# Altium PCB MCU098_MSPM0G3507_PCB.PcbDoc (part 1 of 5)
Units mil, origin at the board's own origin, x right, y up, seen from the top; angles counter-clockwise.
Board outline 2310.03 x 4205.03 mil, 4 copper layers (Top Layer, VCC Layer, GND Layer, Bottom Layer), stack 62.4 mil thick; 260 components, 182 nets, 835 pads, 237 vias.
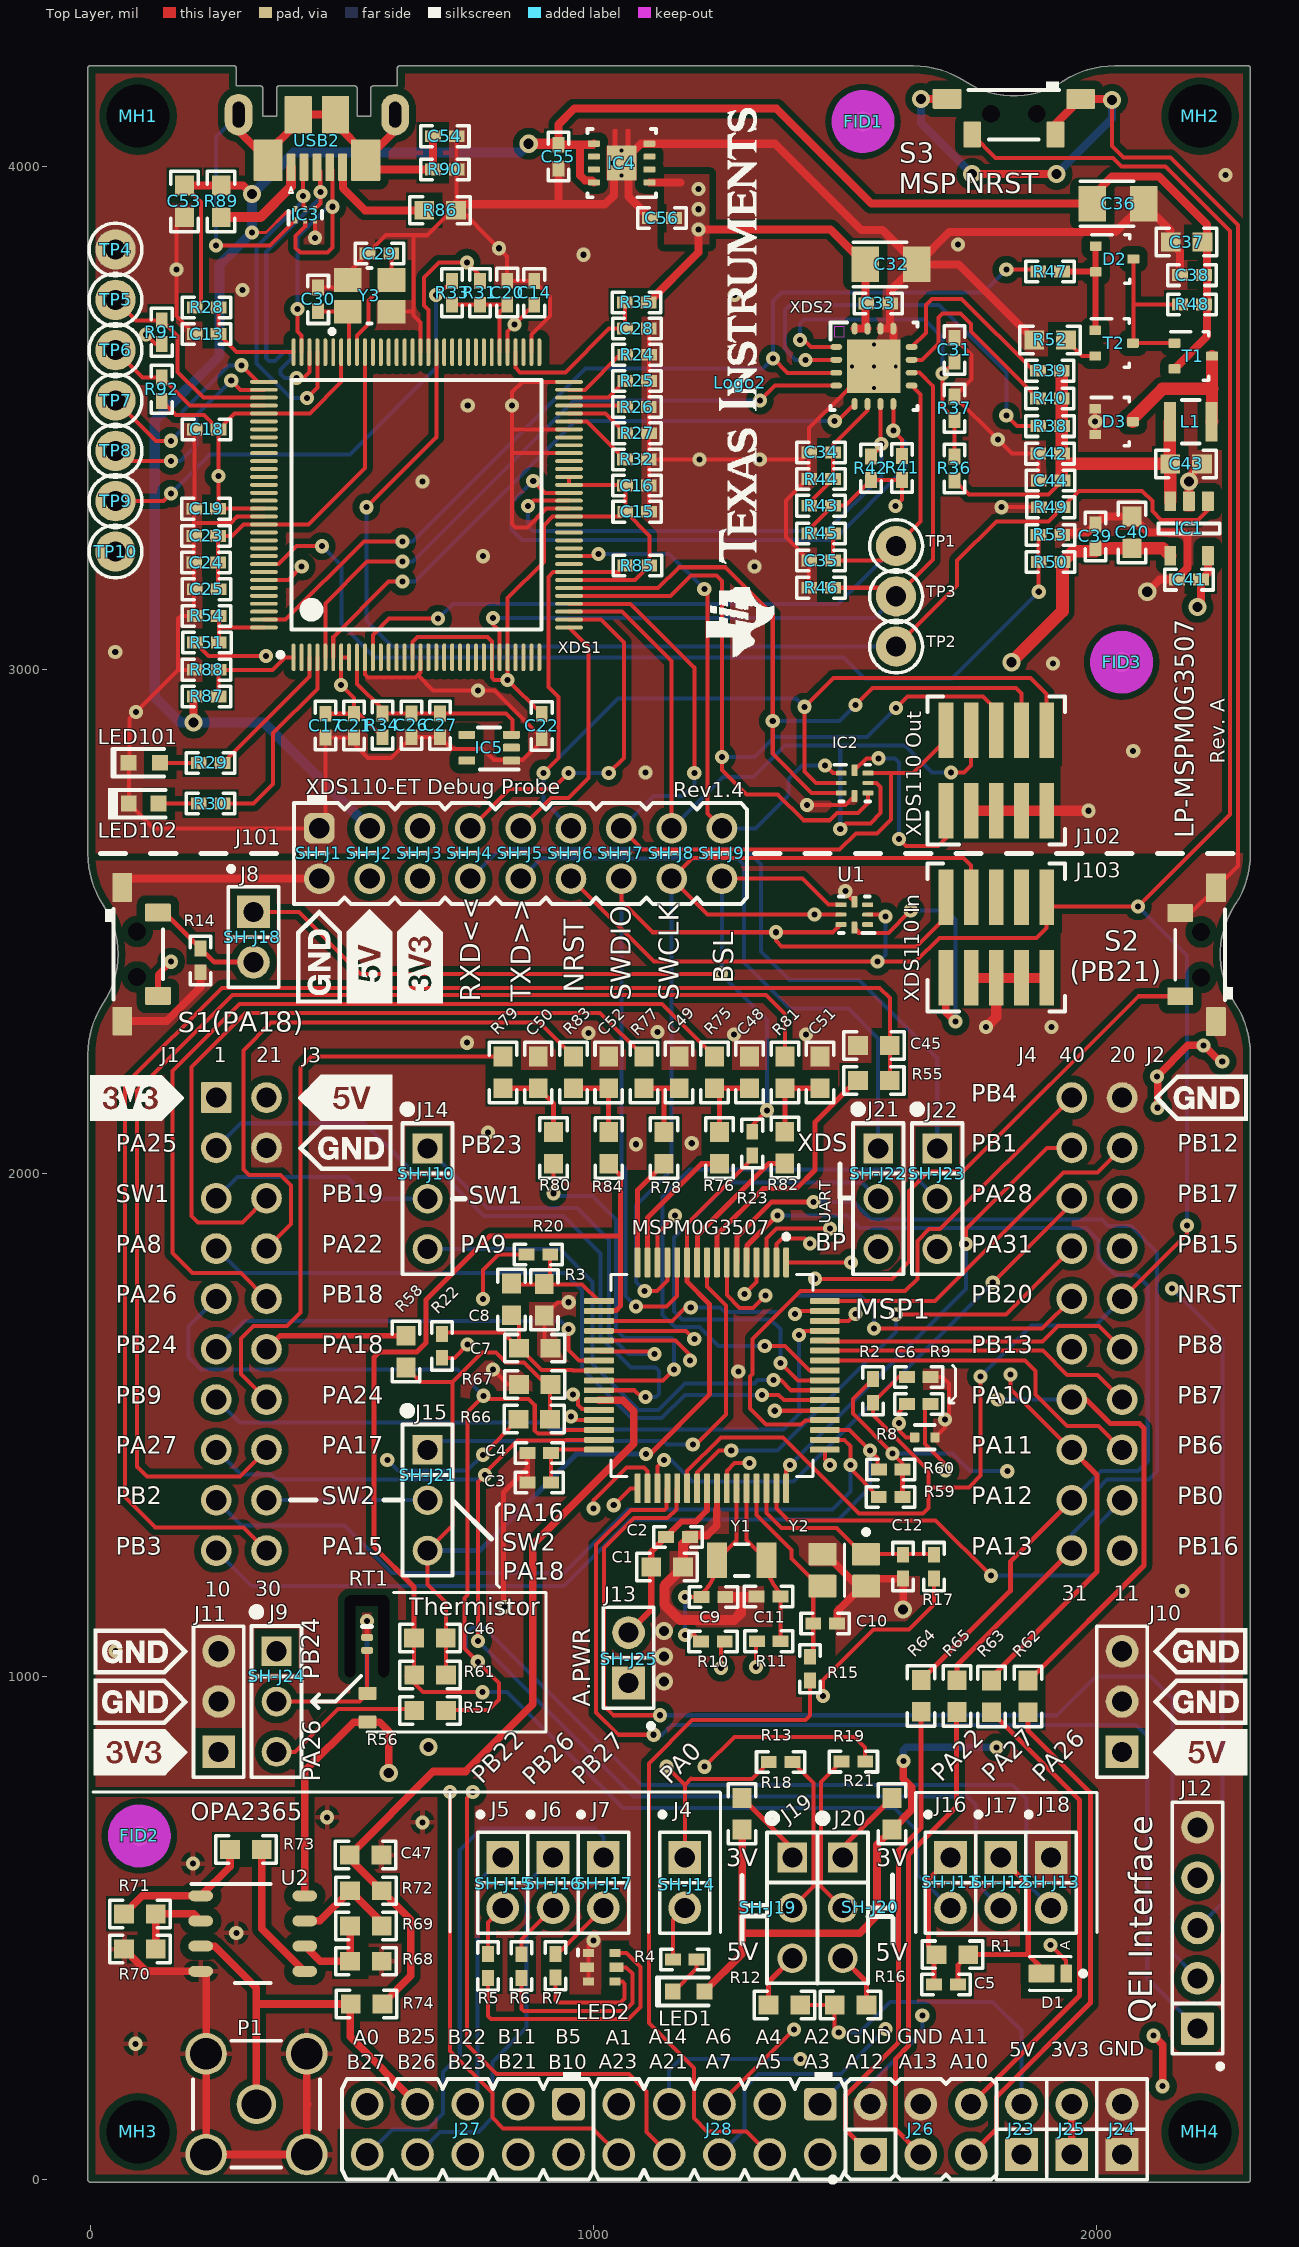
[diagram p0: Top Layer view]
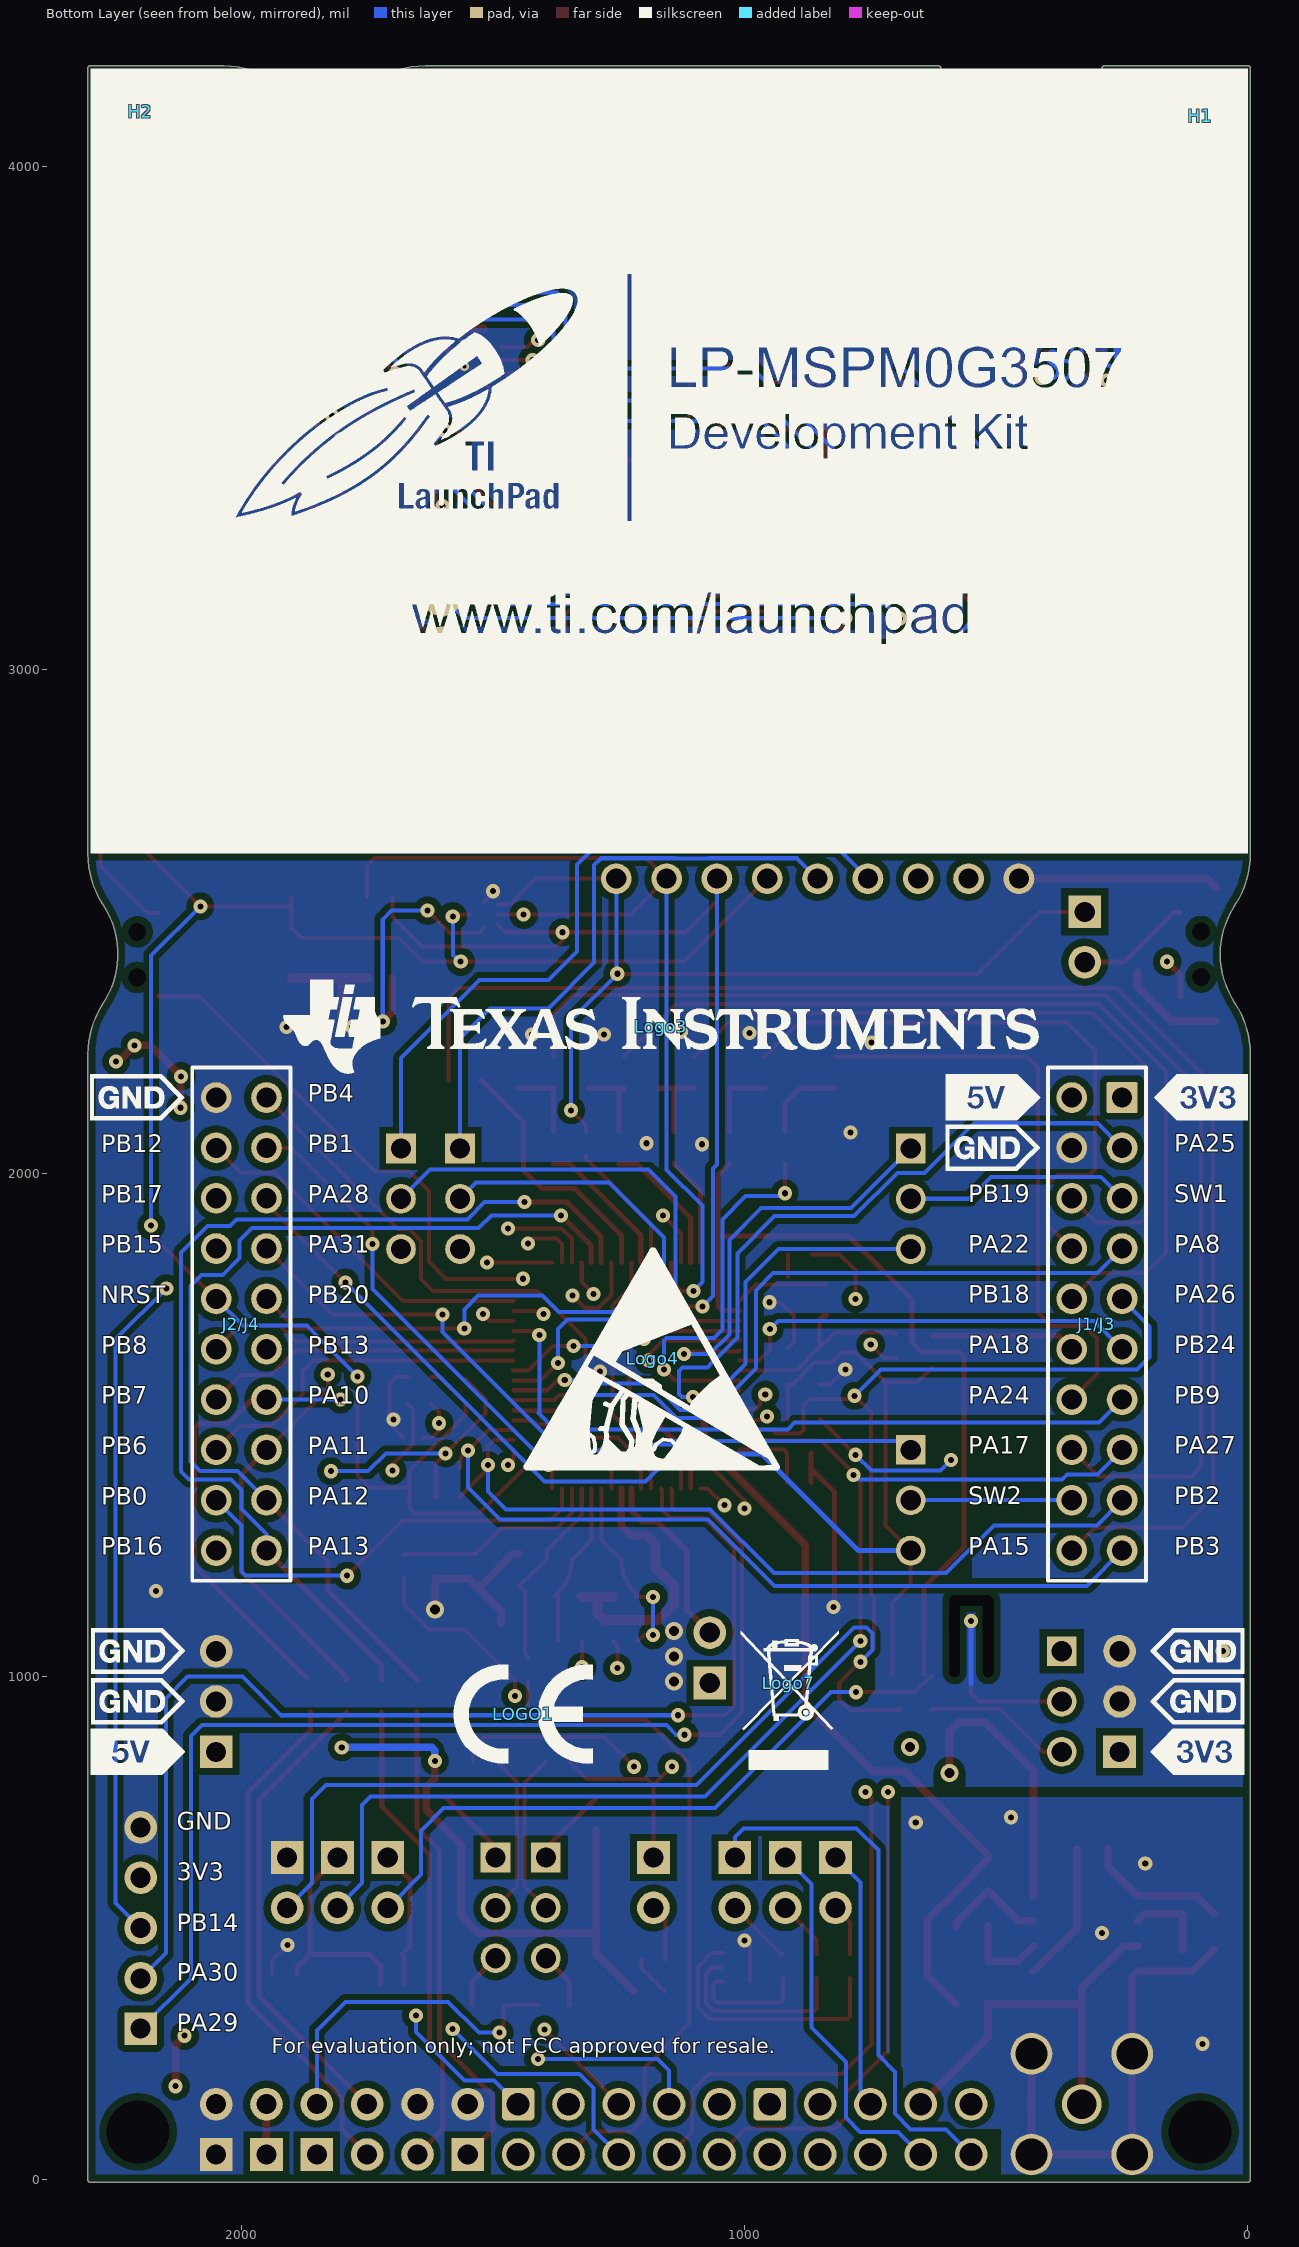
[diagram p1: Bottom Layer view, seen from below]
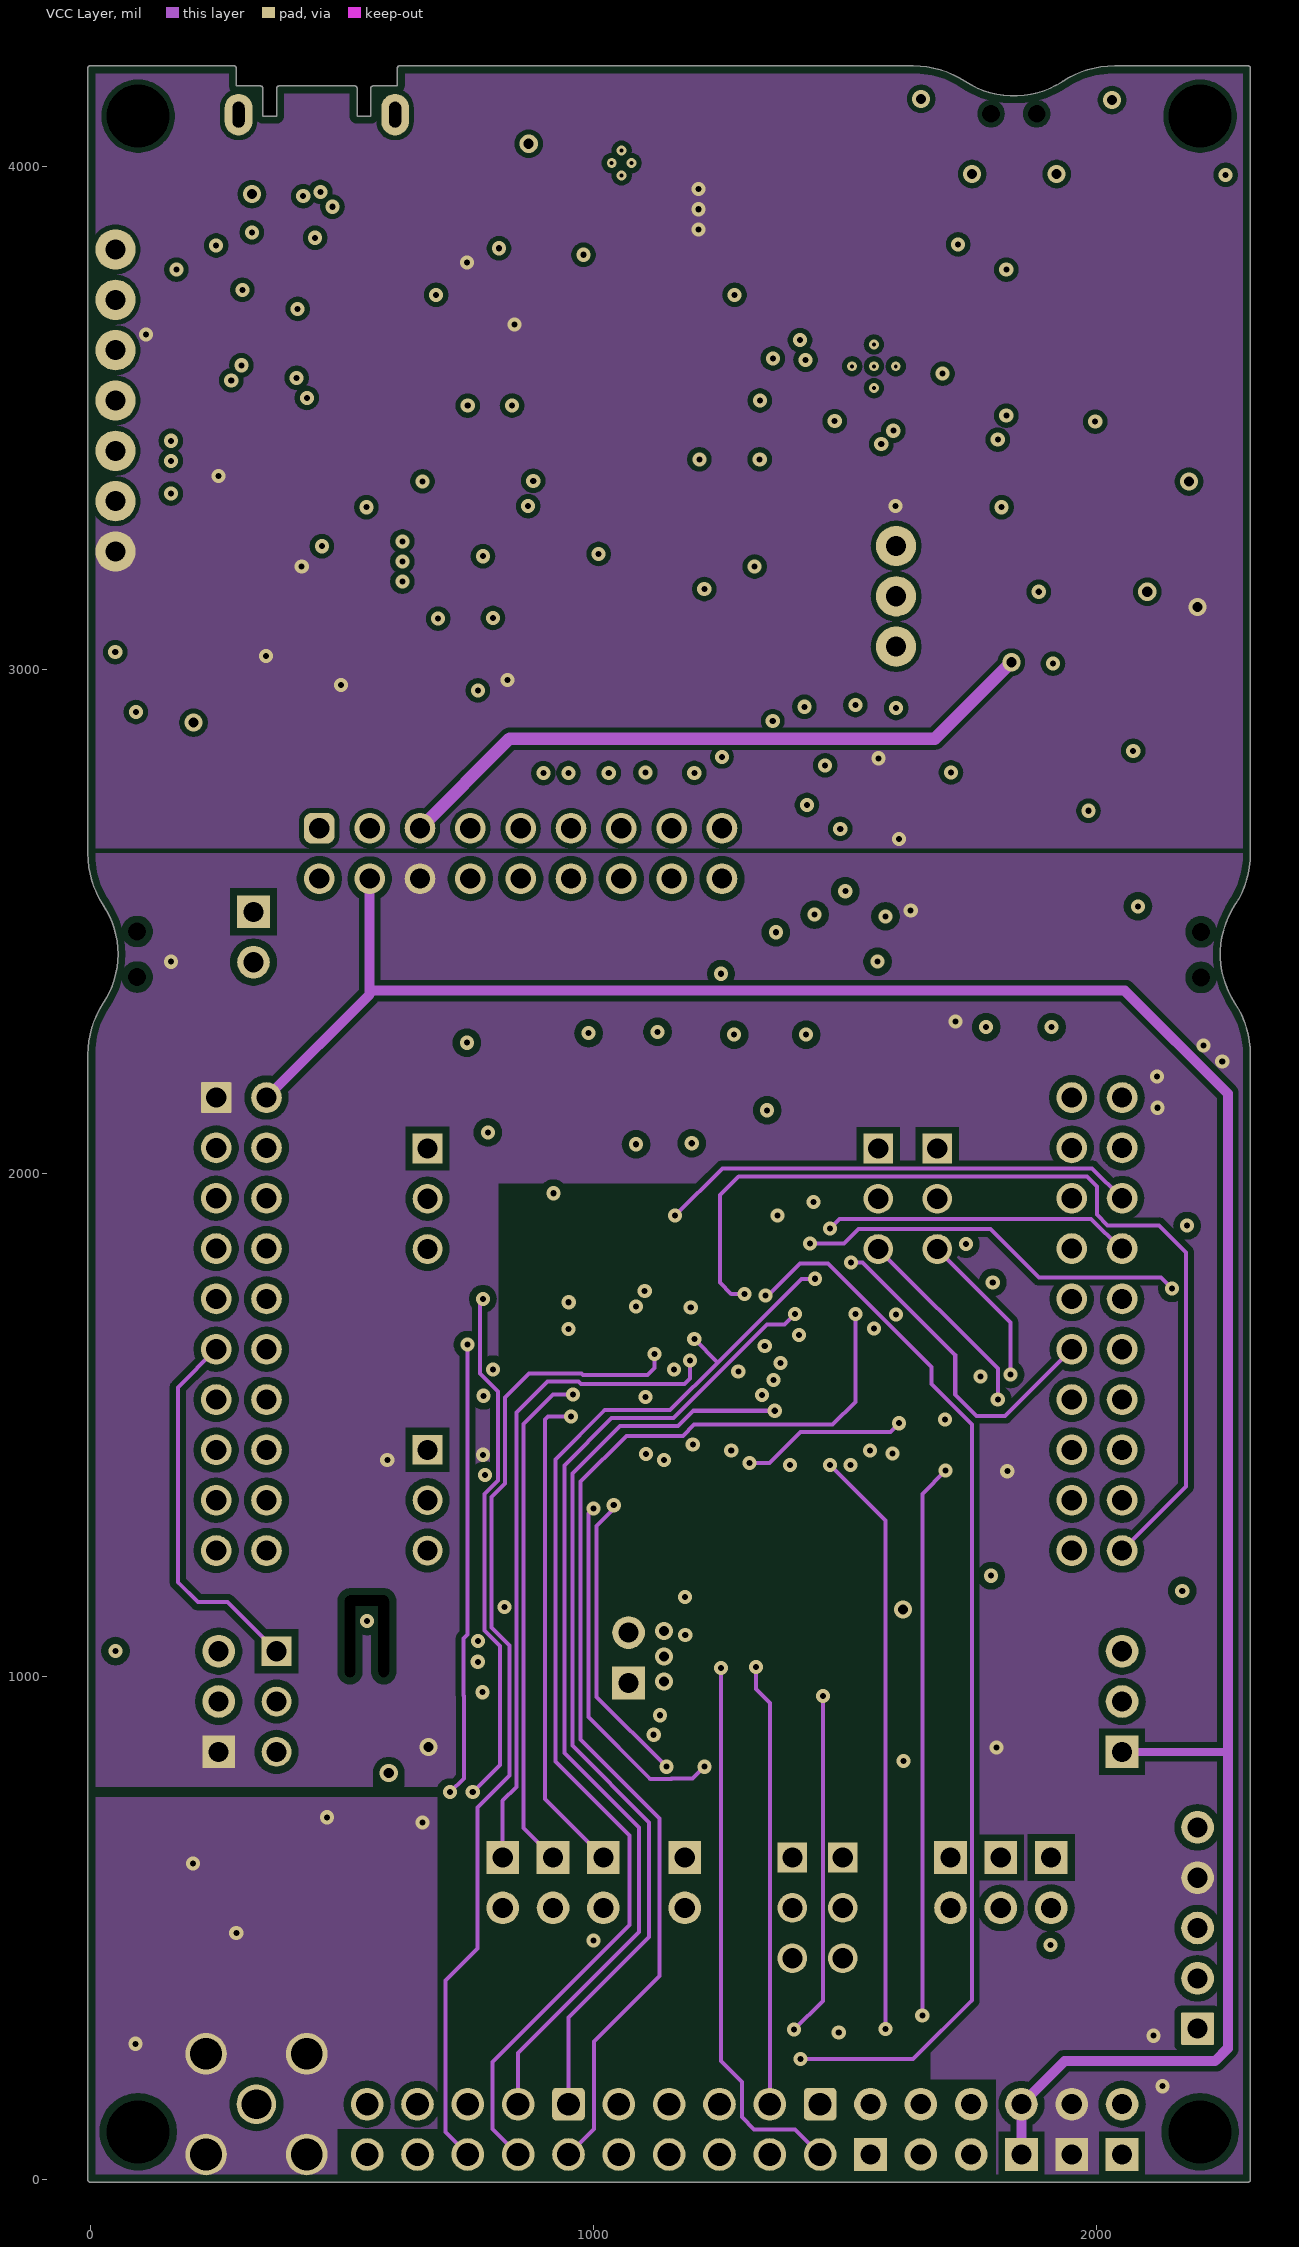
[diagram p2: VCC Layer]
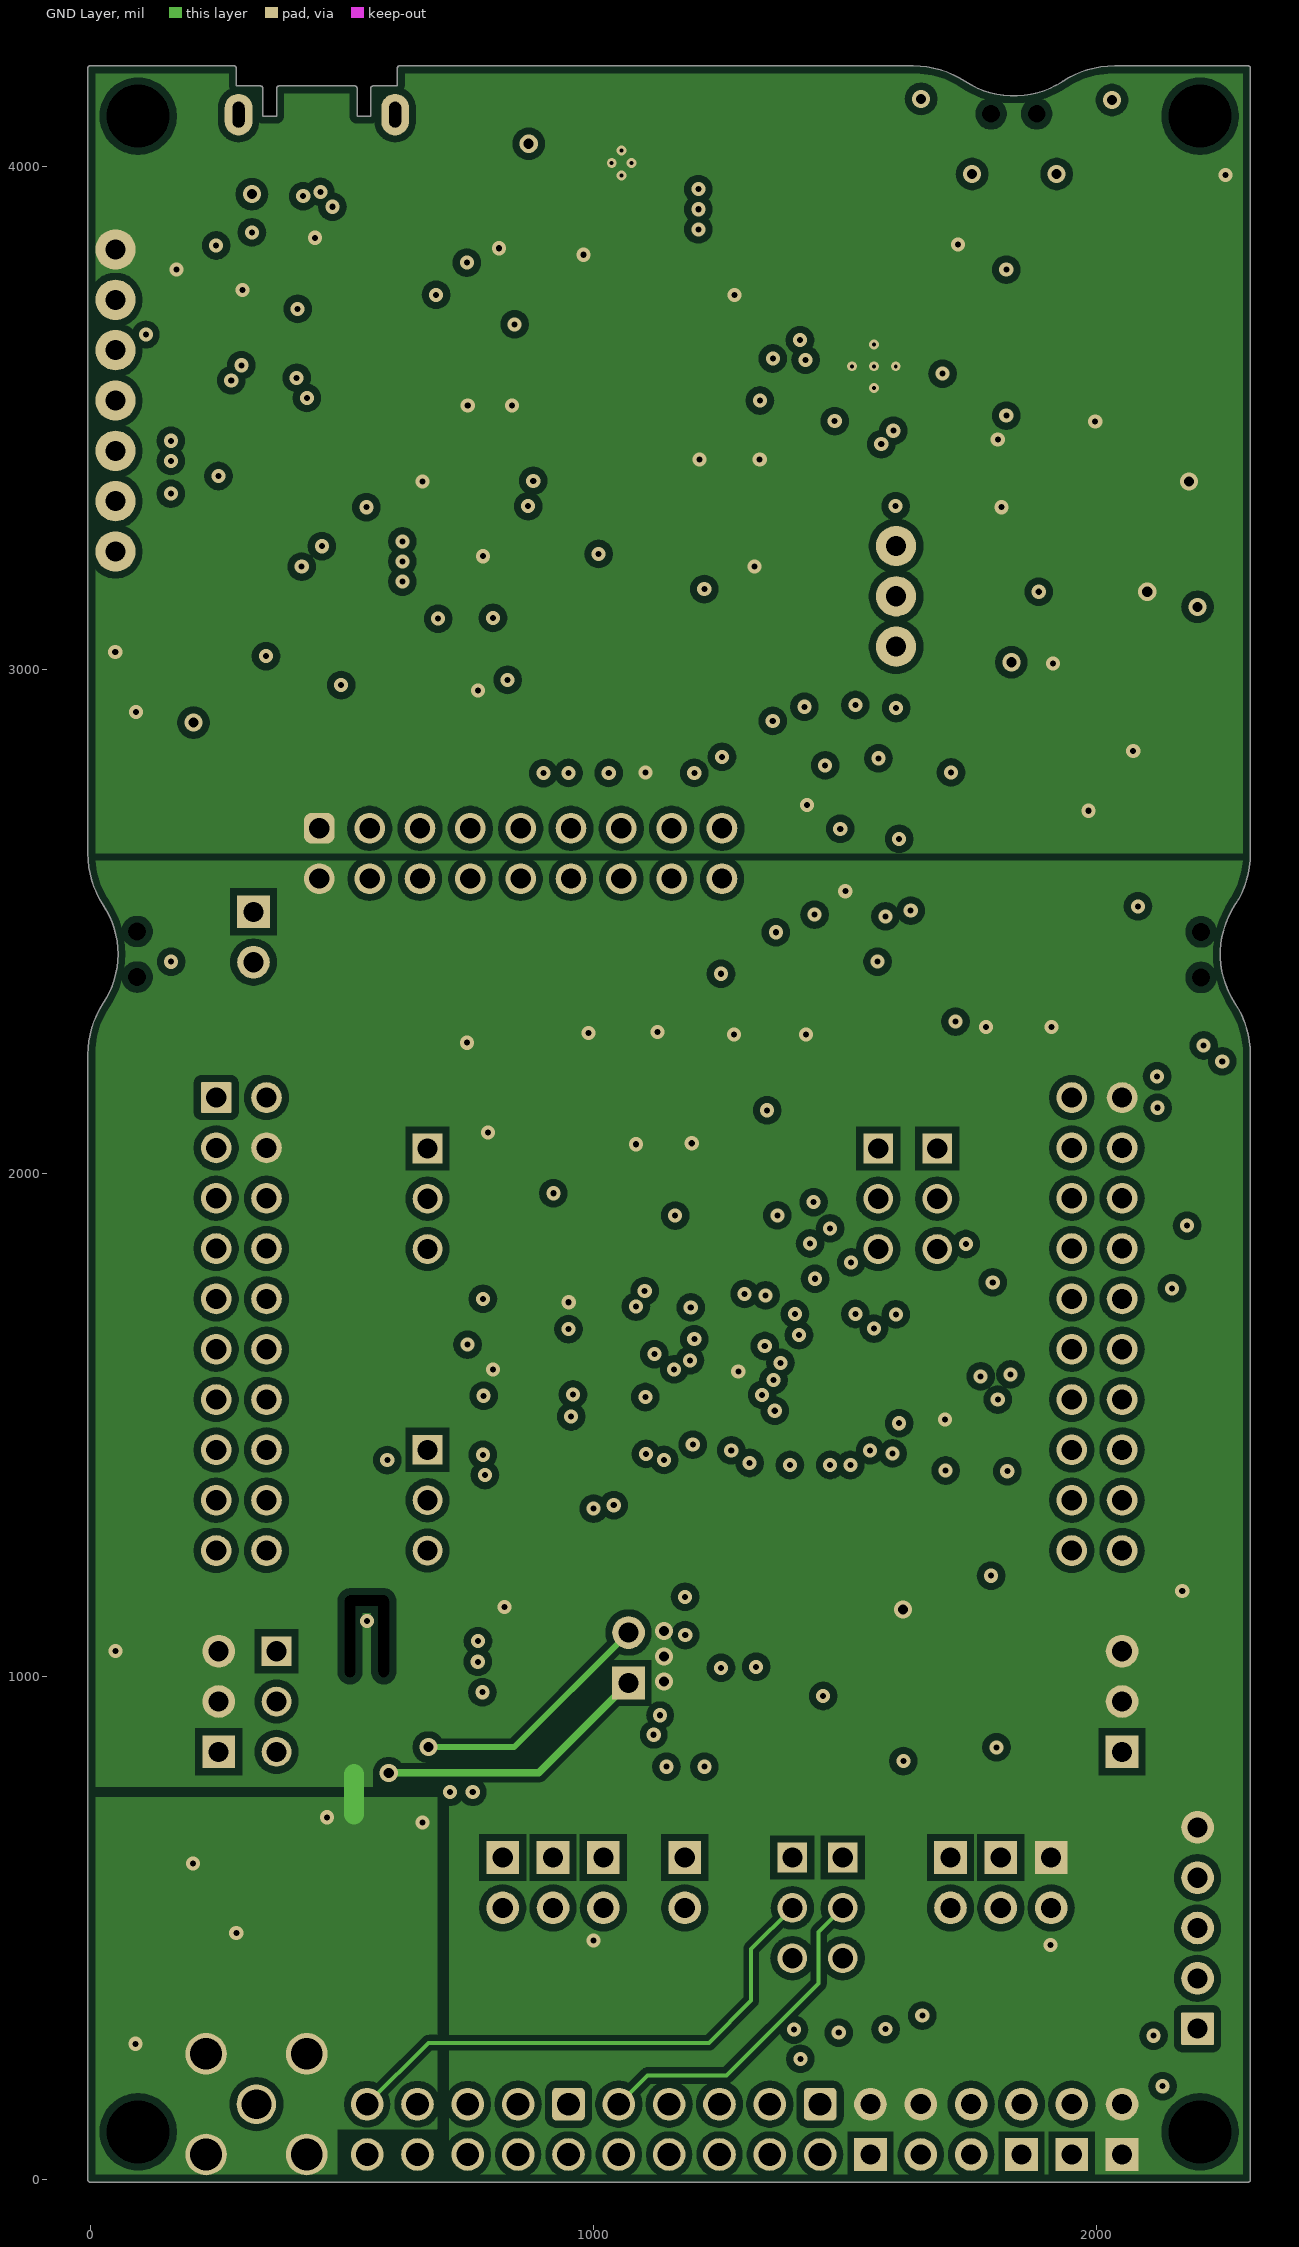
[diagram p3: GND Layer]

## Layer stack, top to bottom
Top Solder: solder mask 0.9843, SM-004, Dk 4
Top Layer: signal copper 1.4
Dielectric 2: core 8.4, FR-4, Dk 4.2
VCC Layer: signal copper 1.4
Dielectric1: prepreg 40, FR-4, Dk 4.2
GND Layer: signal copper 1.4
Dielectric 3: core 8.4, FR-4, Dk 4.2
Bottom Layer: signal copper 1.4
Bottom Solder: solder mask 0.9843, SM-004, Dk 4

## Board outline
-5.01,0 -5.01,2235 cw(c181.67,2235) 25.81,2337.76 ccw(c-121.67,2435) 25.83,2337.79 ccw(c-121.67,2435) 54.99,2435 ccw(c-121.67,2435) 25.88,2532.14 cw(c30,2535) 25.81,2532.24 cw(c181.67,2635) -5.01,2635 -5.01,4195 cw(c0,4195) 0,4200.02 285,4200.02 cw(c285,4195) 290.02,4195 290.02,4160.02 338,4160.02 cw(c338,4155) 343.02,4155 343.02,4100.02 369.99,4100.02 369.99,4155 cw(c375,4155) 375,4160.02 525,4160.02 cw(c525,4155) 530.02,4155 530.02,4100.02 556.99,4100.02 556.99,4155 cw(c562,4155) 562,4160.02 609.99,4160.02 609.99,4195 cw(c615,4195) 615,4200.02 1635,4200.02 cw(c1635,4013.33) 1737.76,4169.19 ccw(c1835,4316.67) 1737.79,4169.17 ccw(c1835,4316.67) 1932.14,4169.12 ccw(c1835,4316.67) 1932.24,4169.18 1932.24,4169.19 cw(c2035,4013.33) 2035,4200.02 2300,4200.02 cw(c2300,4195) 2305.02,4195 2305.02,2635 cw(c2118.33,2635) 2274.19,2532.24 cw(c2270,2535) 2274.17,2532.21 cw(c2421.67,2435) 2274.19,2532.24 2274.17,2532.21 ccw(c2421.67,2435) 2274.12,2337.86 cw(c2270,2335) 2274.19,2337.76 cw(c2118.33,2235) 2305.02,2235 2305.02,0.03 cw(c2300,0) 2305.02,0 2305.02,2235 2305.02,0.03 2305.02,0 cw(c2300,0) 2300,-5.01 0,-5.01 cw(c0,0)

## Design rules (kind name [scope] priority, off if disabled: settings)
AcuteAngle [All] p1: minimum=4.50000000000000E+0001 checktracksonly=FALSE
AssemblyTestPointUsage [All] p1: valid=2
BoardOutlineClearance BoardOutlineClearance_MountingHoles [OnCopper and InComponentClass('Mounting Holes')] p1: gap=15 ignorepadtopadclearanceinfootprint=FALSE
BoardOutlineClearance BoardOutlineClearance_Poly [OnCopper and IsPoly] p2: gap=15 ignorepadtopadclearanceinfootprint=FALSE
BoardOutlineClearance [OnCopper and Not InComponentClass('Logo') and not InComponentClass('FiducialMark') and not InRegion(1000,500,4000,800) and not InPoly] p3: gap=10 ignorepadtopadclearanceinfootprint=FALSE
Clearance SMD [InNamedPolygon('GND_LAYER_GND_P-001')] p1: gap=10 ignorepadtopadclearanceinfootprint=FALSE except(0: Arc-Hole Track-Hole SMDPad-Hole THPad-Hole Via-Hole Fill-Hole Poly-Hole Region-Hole Text-Hole; 20: SMDPad-SMDPad SMDPad-THPad SMDPad-Via SMDPad-Fill SMDPad-Poly SMDPad-Region SMDPad-Text)
Clearance Clearance_FiducialMark [IsKeepOut and InComponentClass('FiducialMark') vs IsPad and InComponentClass('FiducialMark')] p2: gap=0 ignorepadtopadclearanceinfootprint=FALSE
Clearance Clearance_Keepouts [((IsTrack Or IsArc) And Not InPoly) And IsFree and IsKeepOut vs ((IsTrack Or IsArc) And Not InPoly) And IsFree and IsKeepOut] p3: gap=0 ignorepadtopadclearanceinfootprint=FALSE
Clearance Clearance_Poly [InPolygon] p4: gap=14 ignorepadtopadclearanceinfootprint=FALSE except(0: Arc-Hole Track-Hole SMDPad-Hole THPad-Hole Via-Hole Fill-Hole Poly-Hole Region-Hole Text-Hole; 12: Arc-Fill Arc-Poly Arc-Region Track-Fill Track-Poly Track-Region; 15: THPad-THPad; 17: SMDPad-Fill SMDPad-Poly SMDPad-Region)
Clearance [All] p5: gap=6 ignorepadtopadclearanceinfootprint=FALSE
ComponentClearance ComponentClearance_Standoffs [HasFootprint('KY_MAE-10') vs HasFootprint('NPTH125mil')] p1: gap=0 collisioncheckmode=3 verticalgap=0 showdistances=FALSE
ComponentClearance ComponentClearance_2PinHeaders [HasFootprint('TSW-102-07-G-S') vs HasFootprint('TSW-102-07-G-S')] p2: gap=0 collisioncheckmode=3 verticalgap=0 showdistances=FALSE
ComponentClearance ComponentClearance_TestPoint [HasFootprint('Keystone5001') vs HasFootprint('Keystone5001')] p3: gap=0 collisioncheckmode=3 verticalgap=0 showdistances=FALSE
ComponentClearance ComponentClearance_MountingHoles_FiducialMarks [InComponentClass('Mounting Holes') vs InComponentClass('FiducialMark')] p4: gap=0 collisioncheckmode=3 verticalgap=0 showdistances=FALSE
ComponentClearance ComponentClearance_ShuntToShunt [InComponentClass('Shunt') vs InComponentClass('Shunt')] p5: gap=0 collisioncheckmode=3 verticalgap=0 showdistances=FALSE
ComponentClearance ComponentClearance_Shunt [InComponentClass('Header') vs InComponentClass('Shunt')] p6: gap=0 collisioncheckmode=3 verticalgap=0 showdistances=FALSE
ComponentClearance ComponentClearance_Logo [InComponentClass('Logo')] p7: gap=0 collisioncheckmode=3 verticalgap=0 showdistances=FALSE
ComponentClearance ComponentClearance_ScrewToNut [(HasFootprint('NY PMS 440 0025 PH')) vs (HasFootprint('Keystone_1902C'))] p8: gap=5 collisioncheckmode=3 verticalgap=10 showdistances=FALSE
ComponentClearance ComponentClearance_MountingHoles [InComponentClass('Mounting Holes')] p9: gap=250 collisioncheckmode=3 verticalgap=100000 showdistances=FALSE
ComponentClearance ComponentClearance_SmallPassives [HasFootprint('0201*') or HasFootprint('0402*') or HasFootprint('0508') or HasFootprint('0603*') or HasFootprint('0612') or HasFootprint('0805*') or HasFootprint('0815*') or HasFootprint('0830*') or HasFootprint('1206*') or HasFootprint('1210*') or HasFootprint('1808*') or HasFootprint('1812*') or HasFootprint('1825*') or HasFootprint('2010*') or HasFootprint('2220*') or HasFootprint('2225*') or HasFootprint('2512*') or HasFootprint('2728*') or HasFootprint('3518*') vs HasFootprint('0201*') or HasFootprint('0402*') or HasFootprint('0508') or HasFootprint('0603*') or HasFootprint('0612') or HasFootprint('0805*') or HasFootprint('0815*') or HasFootprint('0830*') or HasFootprint('1206*') or HasFootprint('1210*') or HasFootprint('1808*') or HasFootprint('1812*') or HasFootprint('1825*') or HasFootprint('2010*') or HasFootprint('2220*') or HasFootprint('2225*') or HasFootprint('2512*') or HasFootprint('2728*') or HasFootprint('3518*')] p10: gap=0 collisioncheckmode=3 verticalgap=0 showdistances=FALSE
ComponentClearance ComponentClearance_THtoSMT [IsThruComponent vs IsSMTComponent] p11: gap=0 collisioncheckmode=3 verticalgap=0 showdistances=FALSE
ComponentClearance ComponentClearance_THtoTH [IsThruComponent vs IsThruComponent] p12: gap=0 collisioncheckmode=3 verticalgap=0 showdistances=FALSE
ComponentClearance [All] p13: gap=0 collisioncheckmode=3 verticalgap=0 showdistances=FALSE
DiffPairsRouting [All] p1: maxlimit=100 minlimit=10 mostfreqgap=10 toplayer_minwidth=15 toplayer_maxwidth=15 toplayer_prefwidth=15 midlayer1_minwidth=15 midlayer1_maxwidth=15 midlayer1_prefwidth=15 midlayer2_minwidth=15 midlayer2_maxwidth=15 midlayer2_prefwidth=15 bottomlayer_minwidth=15 bottomlayer_maxwidth=15 bottomlayer_prefwidth=15 maxuncoupledlength=1000
FabricationTestPointUsage TestPointUsage [All] p1: valid=2 allowmultiple=FALSE
FabricationTestpoint Testpoint [All] p1: side=3 testpointundercomponent=TRUE minsize=40 maxsize=100 preferedsize=60 minholesize=0 maxholesize=40 preferedholesize=32 testpointgrid=1 allowsidetop=TRUE allowsidebottom=TRUE usegrid=TRUE gridtolerance=0.01
FanoutControl Fanout_LCC [IsLCC] p1: bgadir=Out bgaviamode=Centered fanoutstyle=Auto fanoutdirection=Alternating viagrid=1 // Fanout_LCC (Default Rule)
FanoutControl Fanout_BGA [IsBGA] p2: bgadir=Out bgaviamode=Centered fanoutstyle=Auto fanoutdirection=Alternating viagrid=1 // Fanout_BGA (Default Rule)
FanoutControl Fanout_Default [All] p4: bgadir=Out bgaviamode=Centered fanoutstyle=Auto fanoutdirection=Alternating viagrid=1 // Fanout_Default (Default Rule)
FanoutControl Fanout_Small [(CompPinCount < 5)] p5: bgadir=Out bgaviamode=Centered fanoutstyle=Auto fanoutdirection=OutThenIn viagrid=1 // Fanout_Small (Default Rule)
HoleSize [All] p1: absolutevalues=TRUE maxlimit=251 minlimit=7.87 maxpercent=80.000 minpercent=20.000
MinimumAnnularRing MinimumAnnularRing_ThermalPadVias [IsVia and InAnyComponent] p1: minimumring=5.91
MinimumAnnularRing [All] p2: minimumring=6
MinimumSolderMaskSliver MinimumSolderMaskSliver_Logo [InComponentClass('Logo') vs InComponentClass('Logo')] p1: minsoldermaskwidth=0.7
MinimumSolderMaskSliver [All] p2: minsoldermaskwidth=3.94
PlaneClearance [All] p1: clearance=10
PlaneConnect [All] p1: planeconnectstyle=Relief reliefexpansion=10 reliefentries=4 reliefconductorwidth=10 reliefairgap=10
PolygonConnect PolygonConnect_14 [All vs IsNamedPolygon('GND_LAYER_GND_P-001')] p1: connectstyle=Direct reliefconductorwidth=10 reliefentries=4 polygonreliefangle="90 Angle" airgapwidth=10
PolygonConnect PolygonConnect_13 [All vs IsNamedPolygon('BOTTOM_LAYER_GND_P036')] p2: connectstyle=Direct reliefconductorwidth=10 reliefentries=4 polygonreliefangle="90 Angle" airgapwidth=10
PolygonConnect PolygonConnect_12 [All vs IsNamedPolygon('TOP_LAYER_GND_P034')] p3: connectstyle=Direct reliefconductorwidth=10 reliefentries=4 polygonreliefangle="90 Angle" airgapwidth=10
PolygonConnect PolygonConnect_11 [All vs IsNamedPolygon('VCC_LAYER_3V3_P032')] p4: connectstyle=Direct reliefconductorwidth=10 reliefentries=4 polygonreliefangle="90 Angle" airgapwidth=10
PolygonConnect PolygonConnect_10 [All vs IsNamedPolygon('GND_LAYER_GND_P030')] p5: connectstyle=Direct reliefconductorwidth=10 reliefentries=4 polygonreliefangle="90 Angle" airgapwidth=10
PolygonConnect PolygonConnect_9 [All vs IsNamedPolygon('BOTTOM_LAYER_GND_P028')] p6: connectstyle=Direct reliefconductorwidth=10 reliefentries=4 polygonreliefangle="90 Angle" airgapwidth=10
PolygonConnect PolygonConnect_8 [All vs IsNamedPolygon('GND_LAYER_GND_P026')] p7: connectstyle=Direct reliefconductorwidth=10 reliefentries=4 polygonreliefangle="90 Angle" airgapwidth=10
PolygonConnect PolygonConnect_7 [All vs IsNamedPolygon('VCC_LAYER_GND_P024')] p8: connectstyle=Direct reliefconductorwidth=10 reliefentries=4 polygonreliefangle="90 Angle" airgapwidth=10
PolygonConnect PolygonConnect_6 [All vs IsNamedPolygon('TOP_LAYER_GND_P022')] p9: connectstyle=Relief reliefconductorwidth=10 reliefentries=4 polygonreliefangle="90 Angle" airgapwidth=10
PolygonConnect PolygonConnect_5 [All vs IsNamedPolygon('BOTTOM_LAYER_XDS_GND_P014')] p10: connectstyle=Direct reliefconductorwidth=10 reliefentries=4 polygonreliefangle="90 Angle" airgapwidth=10
PolygonConnect PolygonConnect_4 [All vs IsNamedPolygon('TOP_LAYER_XDS_GND_P010')] p11: connectstyle=Direct reliefconductorwidth=10 reliefentries=4 polygonreliefangle="90 Angle" airgapwidth=10
PolygonConnect PolygonConnect_3 [All vs IsNamedPolygon('GND_LAYER_XDS_GND_P008')] p12: connectstyle=Direct reliefconductorwidth=10 reliefentries=4 polygonreliefangle="90 Angle" airgapwidth=10
PolygonConnect PolygonConnect_2 [All vs IsNamedPolygon('TOP_LAYER_XDS_VCC_P004')] p13: connectstyle=Direct reliefconductorwidth=10 reliefentries=4 polygonreliefangle="90 Angle" airgapwidth=10
RoutingVias ThermalPadVias [IsVia and InAnyComponent] p1: holewidth=7.87 width=19.68 viastyle="Through Hole" minholewidth=7.87 minwidth=19.68 maxholewidth=16 maxwidth=30
RoutingVias [All] p2: holewidth=12 width=28 viastyle="Through Hole" minholewidth=7.87 minwidth=26 maxholewidth=40 maxwidth=65
SilkToBoardRegionClearance [Not ((IsComment or IsDesignator) And (Hide <> 'False')) and not InRegion(1000,500,4000,800)] p1:
SilkToSilkClearance SilkToSilkClearance_Pb-FreeLogo [(HasFootprint('Pb-Free_Overlay_Medium') OR HasFootprint('Pb-Free_Overlay_Small')) vs (HasFootprint('Pb-Free_Overlay_Medium') OR HasFootprint('Pb-Free_Overlay_Small'))] p1: silktosilkclearance=0
SilkToSilkClearance [All] p2: silktosilkclearance=0
SilkToSolderMaskClearance SilkToComponentPadClearance [(IsPad or IsFill or IsRegion) and InAnycomponent] p1: minsilkscreentomaskgap=0 clearancetoexposedcopper=TRUE
SilkToSolderMaskClearance "Silk to Solder Mask Opening" [All] p2: minsilkscreentomaskgap=0 clearancetoexposedcopper=FALSE
SolderMaskExpansion SolderMaskExpansion_via [isvia] p1: expansion=-17 istentingtop=FALSE
SolderMaskExpansion [All] p2: expansion=1.97 istentingtop=FALSE
Width [All] p1: maxlimit=100 minlimit=6 preferedwidth=10 checkconnectedcopper=TRUE
14 further rules are at their usual default settings.

## Classes and differential pairs
component class MCU098_07_Hardware: "30N.C. ROUTE" !PCB FID1 FID2 FID3 H1 H2 LOGO1 Logo2 Logo3 Logo4 Logo6 Logo7 MH1 MH2 MH3 MH4 SH-J1 SH-J2 SH-J3 SH-J4 SH-J5 SH-J6 SH-J7 SH-J8 SH-J9 SH-J10 SH-J11 SH-J12 SH-J13 SH-J14 SH-J15 SH-J16 SH-J17 SH-J18 SH-J19 SH-J20 SH-J21 SH-J22 SH-J23 SH-J24 SH-J25 SH-J101A SH-J101B SH-J101C SH-J101D SH-J101E SH-J101F SH-J101G SH-J101H SH-J101I SH-J101J USB1 ZZ1 ZZ2 ZZ3 ZZ4
component class MCU098_06_XDS110-ET_USB_Power: "30N.C. ROUTE" C53 C54 C55 C56 IC3 IC4 R86 R87 R88 R89 R90 R91 R92 TP4 TP5 TP6 TP7 TP8 TP9 TP10 USB2
component class MCU098_05_XDS110_Target_Interface: "30N.C. ROUTE" IC2 J101 J102 J103 R85 U1
component class MCU098_04_XDS110-ET_EnergyTrace: "30N.C. ROUTE" C31 C32 C33 C34 C35 C36 C37 C38 C39 C40 C41 C42 C43 C44 D2 D3 IC1 L1 R36 R37 R38 R39 R40 R41 R42 R43 R44 R45 R46 R47 R48 R49 R50 R51 R52 R53 R54 T1 T2 XDS2
component class MCU098_03_XDS110_Debug_Probe: "30N.C. ROUTE" C13 C14 C15 C16 C17 C18 C19 C20 C21 C22 C23 C24 C25 C26 C27 C28 C29 C30 IC5 LED101 LED102 R24 R25 R26 R27 R28 R29 R30 R31 R32 R33 R34 R35 TP1 TP2 TP3 XDS1 Y3
component class MCU098_02_BoosterPack_Connectors: "30N.C. ROUTE" C45 C46 C47 C48 C49 C50 C51 C52 J1/J3 J2/J4 J9 J12 J14 J15 J23 J24 J25 J26 J27 J28 P1 R55 R56 R57 R58 R59 R60 R61 R62 R63 R64 R65 R66 R67 R68 R69 R70 R71 R72 R73 R74 R75 R76 R77 R78 R79 R80 R81 R82 R83 R84 RT1 U2
component class MCU098_01_MSPM0G3507_Target_Device: "30N.C. ROUTE" C1 C2 C3 C4 C5 C6 C7 C8 C9 C10 C11 C12 D1 J4 J5 J6 J7 J8 J10 J11 J13 J16 J17 J18 J19 J20 J21 J22 LED1 LED2 MSP1 R1 R2 R3 R4 R5 R6 R7 R8 R9 R10 R11 R12 R13 R14 R15 R16 R17 R18 R19 R20 R21 R22 R23 S1 S2 S3 Y1 Y2
component class FiducialMark: "30N.C. ROUTE" FID1 FID2 FID3
component class AssemblyNote: "30N.C. ROUTE" ZZ2 ZZ3 ZZ4 ZZ6
component class Logo: "30N.C. ROUTE" Logo2 Logo3
component class Header: "30N.C. ROUTE" J4 J5 J6 J7 J8 J9 J10 J11 J12 J13 J14 J15 J16 J17 J18 J19 J20 J21 J22 J23 J24 J25 J26 J27 J28 J101
component class Shunt: SH-J1 SH-J2 SH-J3 SH-J4 SH-J5 SH-J6 SH-J7 SH-J8 SH-J9 SH-J10 SH-J11 SH-J12 SH-J13 SH-J14 SH-J15 SH-J16 SH-J17 SH-J18 SH-J19 SH-J20 SH-J21 SH-J22 SH-J23 SH-J24 SH-J25

## Components (designator, comment, footprint, x,y, rotation, side; value= is the part's Value field where it differs from the comment)
C1 "GRM188R60J106ME84" 0603 1146,1217 r0 top value=10uF
C2 "GRM155R61H104ME14D" 0402 1167.65,1277 r0 top value=0.1uF
C3 "GRM155R60J474KE19D" 0402 892,1385.27 r180 top value=0.47uF
C4 "GRM155R61H104ME14D" 0402 892,1444 r180 top value=0.1uF
C5 "GRM1555C1E470JA01D" 0402 1700,387.54 r0 top value=47pF
C6 "GRM155R61C103KA01D" 0402 1646,1595 r0 top value=0.01uF
C7 "C1608X5R1E105K080AC" 0603 883,1652 r0 top value=1uF
C8 "C1608X5R1E105K080AC" 0603 836.63,1749 r90 top value=1uF
C9 "GRM1555C1H220JA01D" 0402 1238,1158 r180 top value=22pF
C10 "GRM1555C1H220JA01D" 0402 1460,1105 r180 top value=22pF
C11 "GRM1555C1H220JA01D" 0402 1347.34,1158.65 r0 top value=22pF
C12 "GRM1555C1H220JA01D" 0402 1615,1218 r90 top value=22pF
C13 "GRM155R70J104KA01D" 0402 231,3667 r180 top value=0.1uF
C14 "GRM155R71E103KA01D" 0402 882,3749 r90 top value=0.01uF
C15 "GRM155R71E103KA01D" 0402 1086.5,3314 r0 top value=0.01uF
C16 "GRM155R71E103KA01D" 0402 1086,3366 r0 top value=0.01uF
C17 "GRM155R70J104KA01D" 0402 467.5,2889 r270 top value=0.1uF
C18 "GRM155R70J104KA01D" 0402 231,3477.61 r180 top value=0.1uF
C19 "C1005X5R1E105K050BC" 0402 230,3320 r180 top value=1uF
C20 "GRM155R70J104KA01D" 0402 828.45,3749.33 r90 top value=0.1uF
C21 "C1005X5R1E105K050BC" 0402 524,2889 r270 top value=1uF
C22 "GRM155R71E103KA01D" 0402 897,2888.38 r270 top value=0.01uF
C23 "GRM155R60J225KE95D" 0402 230,3266 r180 top value=2.2uF
C24 "GRM155R70J104KA01D" 0402 230,3213 r180 top value=0.1uF
C25 "C1005X5R1E105K050BC" 0402 231,3160 r180 top value=1uF
C26 "GRM155R71E103KA01D" 0402 638,2889.63 r270 top value=0.01uF
C27 "GRM155R70J104KA01D" 0402 695,2889.63 r270 top value=0.1uF
C28 "GRM155R70J104KA01D" 0402 1086,3678 r0 top value=0.1uF
C29 "GRM1555C1H120JA01D" 0402 574.38,3826.97 r180 top value=12pF
C30 "GRM1555C1H120JA01D" 0402 452.72,3736 r90 top value=12pF
C31 "GRM1555C1H330JA01D" 0402 1717,3635.62 r90 top value=33pF
C32 "TAJA475K016RNJ" 3216-18 1591.02,3805.58 r0 top value=4.7uF
C33 "GRM155R70J104KA01D" 0402 1565.38,3728 r0 top value=0.1uF
C34 "GRM1555C1H330JA01D" 0402 1452,3432 r180 top value=33pF
C35 "GCM155R71H102KA37D" 0402 1452,3217 r180 top value=1000pF
C36 "TAJA475K016RNJ" 3216-18 2042,3926 r0 top value=4.7uF
C37 "GRM188R61C475KAAJ" 0603 2178,3849.87 r0 top value=4.7uF
C38 "GRM155R70J104KA01D" 0402 2189,3784 r180 top value=0.1uF
C39 "GRM155R70J104KA01D" 0402 1997,3265 r90 top value=0.1uF
C40 "GRM188R60J476ME15D" 0603 2070,3273 r90 top value=47uF
C41 "GRM155R71C224KA12D" 0402 2183,3179 r180 top value=0.22uF
C42 "GRM155R71C224KA12D" 0402 1907,3429.35 r180 top value=0.22uF
C43 "GRM188R61C475KAAJ" 0603 2177,3409 r180 top value=4.7uF
C44 "GRM155R70J104KA01D" 0402 1908,3376 r180 top value=0.1uF
C45 "C0603C225K8PACTU" 0603 1557.03,2253.53 r180 top value=2.2uF
C46 "C0603C225K8PACTU" 0603 674.76,1076.5 r180 top value=2.2uF
C47 "C0603C820K5GACTU" 0603 547.01,644.99 r0 top value=82pF
C48 "C0603C225K8PACTU" 0603 1310,2200 r90 top value=2.2uF
C49 "C0603C225K8PACTU" 0603 1170,2200 r90 top value=2.2uF
C50 "C0603C225K8PACTU" 0603 890,2200 r90 top value=2.2uF
C51 "C0603C225K8PACTU" 0603 1450,2200 r90 top value=2.2uF
C52 "C0603C225K8PACTU" 0603 1030,2200 r90 top value=2.2uF
C53 "C0603C225K8PACTU" 0603 187,3930.72 r270 top value=2.2uF
C54 "GRM155R71H332KA01D" 0402 704.38,4060 r0 top value=3300pF
C55 "C1005X5R1E105K050BC" 0402 930,4019.58 r270 top value=1uF
C56 "GRM155R60J225KE95D" 0402 1135.73,3897.58 r180 top value=2.2uF
D1 "VEMD4110X01" FP-VEMD4110X01_0805-MFG 1907.5,409.52 r90 top
D2 "BAS40-05W,115" SOT-323 2035,3816.13 r0 top value=40V
D3 "BAS40-05W,115" SOT-323 2034,3493 r0 top value=40V
FID1 "Fiducial" Fiducial10-30 1535.26,4089.22 r0 top
FID2 "Fiducial" Fiducial10-30 97.5,683 r90 top
FID3 "Fiducial" Fiducial10-30 2049.12,3015 r90 top
H1 "MAE-10" KY_MAE-10 95,4100 r180 bottom
H2 "MAE-10" KY_MAE-10 2201,4108.78 r180 bottom
IC1 "TPS2102DBVR" DBV0005A_N 2183,3280.87 r270 top
IC2 "TPD6E004RSER" RSE0008A 1518.56,2774.88 r0 top
IC3 "TPD4E004DRYR" DRY0006A 427,3904 r90 top
IC4 "TPS73533DRBT" DRB0008A 1055.61,4006.78 r180 top
IC5 "LM4040C25IDCKR" DCK0005A_N 792.34,2845.16 r180 top
J1/J3 "SSQ-110-03-T-D" BoosterPack_40pin_J1J3 300,1700 r180 bottom locked
J2/J4 "SSQ-110-03-T-D" BoosterPack_40pin_J2J4 2000,1700 r180 bottom locked
J4 "90120-0122" CONN_90120-0122 1181.14,590 r270 top
J5 "90120-0122" CONN_90120-0122 819.38,590 r270 top
J6 "90120-0122" CONN_90120-0122 919.38,590 r270 top
J7 "90120-0122" CONN_90120-0122 1019.38,590 r270 top
J8 "90120-0122" CONN_90120-0122 324.12,2468.97 r270 top
J9 "PEC03SAAN" CONN_PEC03SAAN 370,950 r270 top
J10 "PEC03SAAN" PEC03SAAN_Launchpad_5V0 2050,950 r90 top
J11 "PEC03SAAN" PEC03SAAN_Launchpad_3V3 255,950 r90 top
J12 "HTSW-105-07-G-S" Samtec_HTSW-105-07-G-S 2200,500 r90 top net-tie
J13 "90120-0122" CONN_90120-0122 1069.38,1037 r90 top
J14 "PEC03SAAN" CONN_PEC03SAAN 670,1949 r270 top
J15 "PEC03SAAN" CONN_PEC03SAAN 670,1350 r270 top
J16 "90120-0122" CONN_90120-0122 1709,590 r270 top
J17 "90120-0122" CONN_90120-0122 1809,590 r270 top
J18 "90120-0122" CONN_90120-0122 1909,590 r270 top
J19 "PEC03SAAN" CONN_PEC03SAAN 1394.88,540 r270 top
J20 "PEC03SAAN" CONN_PEC03SAAN 1494.88,540 r270 top
J21 "PEC03SAAN" CONN_PEC03SAAN 1565.39,1949 r270 top
J22 "PEC03SAAN" CONN_PEC03SAAN 1682.72,1949 r270 top
J23 "90120-0122" CONN_90120-0122 1850,100 r90 top
J24 "90120-0122" CONN_90120-0122 2050,100 r90 top
J25 "90120-0122" CONN_90120-0122 1950,100 r90 top
J26 "PBC03DAAN" Sullins_PBC03DAAN 1650,100 r90 top
J27 "61301021121" WURTH_61301021121 750,100 r180 top
J28 "61301021121" WURTH_61301021121 1250,100 r180 top
J101 "PEC09DAAN" Sullins_PxC09DAAN 855,2635 r270 top
J102 "FTSH-105-01-L-DV-K" Samtec_FTSH-105-01-x-DV-K 1800,2800 r90 top
J103 "FTSH-105-01-L-DV-K" Samtec_FTSH-105-01-x-DV-K 1800,2468 r90 top
L1 "CBC2518T2R2M" CBC2518 2186.4,3493 r180 top value=2.2uH
LED1 "BR1111C-TR" 1111C_Red 1188.79,374 r180 top value=Red
LED2 "19-337/R6GHBHC-A01/2T" 19-337_RGB 1016,422 r0 top value=Rgb
LED101 "BR1111C-TR" 1111C_Red 107.12,2815.41 r180 top value=Red
LED102 "LTST-C190GKT" LED_LTST-C190 106,2734 r180 top value=Green
LOGO1 "CE Mark" CE_Mark_5mm 1440.03,925 r180 bottom
Logo2 "Texas Instruments" TI_Horizontal_Overlay_Small 1291,3570 r90 top
Logo3 "Texas Instruments" TI_Horizontal_Overlay_Medium 1166,2291 r180 bottom
Logo4 "ESD Susceptible" ESD_Overlay_Large 1182.65,1630.69 r180 bottom
Logo6 "FCC disclaimer" FCC_disclaimer 3226,1764 r0 bottom
Logo7 "WEEE logo" WEEE_Minimum 912.57,986.5 r180 bottom
MH1 "MTG_NoPads" NPTH125mil 95,4100 r0 top locked
MH2 "MTG_NoPads" NPTH125mil 2205,4100 r0 top locked
MH3 "MTG_NoPads" NPTH125mil 95,95 r0 top locked
MH4 "MTG_NoPads" NPTH125mil 2205,95 r0 top locked
MSP1 "MSPM0G3507SPM" PM0064A-MFG 1235,1598 r270 top (schematic designator U1)
P1 "5-1814832-1" TE_5-1814832-1 330,150 r0 top
R1 "CRCW06032M37FKEA" 0603 1713,447 r180 top value=2.37Meg
R2 "CRCW040247K0JNED" 0402 1555,1567.38 r90 top value=47k
R3 "RC0603JR-070RL" 0603 902,1748.34 r90 top value=0
R4 "CRCW0402470RJNED" 0402 1181,437.26 r0 top value=470
R5 "CRCW0402220RJNED" 0402 790.16,424.43 r270 top value=220
R6 "CRCW0402330RJNED" 0402 857,424.38 r270 top value=330
R7 "CRCW0402330RJNED" 0402 924,425 r270 top value=330
R8 "ERA-2AEB104X" FP-ERA-2AEB104X_0402-MFG 1658,1475 r0 top
R9 "RC0402JR-070RL" 0402 1646,1541 r180 top value=0
R10 "RC0402JR-070RL" 0402 1237,1069 r180 top value=0
R11 "RC0402JR-070RL" 0402 1348,1069.75 r0 top value=0
R12 "RC0603JR-074K7L" 0603 1379,347 r0 top value=4.7k
R13 "CRCW0402270RJNED" 0402 1371.62,830 r0 top value=270
R14 "CRCW040247K0JNED" 0402 219,2422.62 r90 top value=47k
R15 "RC0402JR-070RL" 0402 1430,1015.25 r90 top value=0
R16 "RC0603JR-074K7L" 0603 1510.5,347 r180 top value=4.7k
R17 "RC0402JR-070RL" 0402 1676.38,1218 r90 top value=0
R18 "RC0603JR-0710KL" 0603 1295,727 r270 top value=2.2k
R19 "CRCW0402270RJNED" 0402 1516,830.5 r180 top value=270
R20 "RC0402JR-070RL" 0402 890.04,1838 r0 top value=0
R21 "RC0603JR-0710KL" 0603 1593,727 r270 top value=2.2k
R22 "RC0402JR-070RL" 0402 699,1656.63 r90 top value=0
R23 "RC0402JR-070RL" 0402 1315.24,2058.54 r270 top value=0
R24 "CRCW04021K00JNED" 0402 1086.37,3626 r0 top value=1.0k
R25 "CRCW04021K00JNED" 0402 1086.37,3574 r0 top value=1.0k
R26 "CRCW04021K00JNED" 0402 1086,3522 r0 top value=1.0k
R27 "CRCW04021K00JNED" 0402 1086.37,3470 r0 top value=1.0k
R28 "CRCW0402100RJNED" 0402 231,3720 r0 top value=100
R29 "CRCW0402470RJNED" 0402 239,2815 r0 top value=470
R30 "CRCW0402470RJNED" 0402 239,2734 r0 top value=470
R31 "CRCW040210K0JNED" 0402 774,3749 r90 top value=10k
R32 "CRCW04024K87FKED" 0402 1086,3418 r180 top value=4.87k
R33 "CRCW0402100RJNED" 0402 718.87,3749 r270 top value=100
R34 "CRCW04021K00JNED" 0402 580.4,2889.63 r270 top value=1.0k
R35 "CRCW040251R0JNED" 0402 1085.38,3730 r0 top value=51
R36 "RC0402FR-07220KL" 0402 1717,3400 r270 top value=220k
R37 "RC0402FR-07220KL" 0402 1717,3519.62 r270 top value=220k
R38 "ERJ-2RKF3301X" 0402 1907,3484 r0 top value=3.30k
R39 "CRCW04022K20FKED" 0402 1906.38,3594.2 r0 top value=2.20k
R40 "CRCW04026K81FKED" 0402 1906.38,3539 r0 top value=6.81k
R41 "CRCW04024K70JNED" 0402 1613,3401 r270 top value=4.7k
R42 "CRCW04024K70JNED" 0402 1551,3400.35 r270 top value=4.7k
R43 "RC0402FR-07220KL" 0402 1452,3326 r0 top value=220k
R44 "RC0402FR-07220KL" 0402 1452,3379 r0 top value=220k
R45 "RC0402FR-0747KL" 0402 1452,3271 r180 top value=47.0k
R46 "RC0402FR-0747KL" 0402 1452,3163 r0 top value=47.0k
R47 "RC0402FR-07820RL" 0402 1907,3791 r180 top value=820
R48 "CRCW0402470RJNED" 0402 2189,3726 r0 top value=470
R49 "RC0402FR-0747KL" 0402 1908.38,3323 r0 top value=47.0k
R50 "RC0402FR-07220KL" 0402 1908,3214 r0 top value=220k
R51 "RC0402FR-07220KL" 0402 231.62,3054 r180 top value=220k
R52 "RC0603JR-070RL" 0603 1907,3655.41 r0 top value=0
R53 "RC0402FR-07220KL" 0402 1907.62,3268 r180 top value=220k
R54 "RC0402FR-07220KL" 0402 231,3107 r0 top value=220k
R55 "RC0603JR-070RL" 0603 1556.69,2183.75 r0 top value=0
R56 "ERA3ARB103V" ERA3A 551,937.75 r270 top value=10.0k
R57 "RC0603JR-070RL" 0603 674.99,932 r180 top value=0
R58 "RC0603JR-070RL" 0603 627,1645.31 r270 top value=0
R59 "CRCW04024K70JNED" 0402 1590,1356.35 r180 top value=4.7k
R60 "CRCW04024K70JNED" 0402 1590.38,1411.04 r180 top value=4.7k
R61 "RC0603JR-070RL" 0603 674.99,1003.04 r180 top value=0
R62 "RC0603JR-070RL" 0603 1862.84,960.25 r90 top value=0
R63 "RC0603JR-070RL" 0603 1790.84,960.25 r90 top value=0
R64 "RC0603JR-070RL" 0603 1650.84,961.25 r90 top value=0
R65 "RC0603JR-070RL" 0603 1721.84,960.75 r90 top value=0
R66 "RC0603JR-070RL" 0603 882,1511 r0 top value=0
R67 "RC0603JR-070RL" 0603 883,1580 r0 top value=0
R68 "RC0603JR-070RL" 0603 547.5,433.99 r180 top value=0
R69 "RC0603JR-070RL" 0603 547.5,503.99 r0 top value=0
R70 "RC0603JR-070RL" 0603 98.51,457.99 r0 top value=0
R71 "RC0603JR-070RL" 0603 98.51,527.99 r180 top value=0
R72 "RC0603FR-07100RL" 0603 547.5,573.99 r0 top value=100
R73 "RC0603JR-070RL" 0603 309.01,655.99 r0 top value=0
R74 "RC0603JR-070RL" 0603 549,349 r0 top value=0
R75 "RC0603JR-070RL" 0603 1240,2200 r270 top value=0
R76 "RC0603JR-070RL" 0603 1250,2050 r270 top value=0
R77 "RC0603JR-070RL" 0603 1100,2200 r270 top value=0
R78 "RC0603JR-070RL" 0603 1140,2050 r270 top value=0
R79 "RC0603JR-070RL" 0603 820,2200 r270 top value=0
R80 "RC0603JR-070RL" 0603 920,2050 r270 top value=0
R81 "RC0603JR-070RL" 0603 1380,2200 r270 top value=0
R82 "RC0603JR-070RL" 0603 1379.84,2050.75 r270 top value=0
R83 "RC0603JR-070RL" 0603 960,2200 r270 top value=0
R84 "RC0603JR-070RL" 0603 1030,2050 r270 top value=0
R85 "ERJ-2RKF3301X" 0402 1087,3207 r0 top value=3.30k
R86 "RC0603JR-070RL" 0603 694.94,3912.96 r0 top value=0
R87 "RC0402FR-07330KL" 0402 231,2947 r0 top value=330k
R88 "RC0402FR-07220KL" 0402 231,3000 r0 top value=220k
R89 "RC0603JR-070RL" 0603 260,3930.72 r90 top value=0
R90 "CRCW04021M00FKED" 0402 704.38,3994 r180 top value=1.00Meg
R91 "CRCW040210K0JNED" 0402 142,3670.76 r90 top value=10k
R92 "CRCW040210K0JNED" 0402 142,3557.38 r90 top value=10k
RT1 "TMP6131DECT" DEC0002A 550,1064.5 r270 top
S1 "1188E-1K2-V-TR" SW_1188E 106.78,2434.72 r0 top locked
S2 "1188E-1K2-V-TR" SW_1188E 2193,2434 r180 top locked
S3 "1188E-1K2-V-TR" SW_1188E 1835,4091 r270 top locked
SH-J1 "SNT-100-BK-G" SNT-100-BK-G 454.21,2635 r90 top value="J101: 1-2"
SH-J2 "SNT-100-BK-G" SNT-100-BK-G 554.21,2635 r90 top value="J101: 3-4"
SH-J3 "SNT-100-BK-G" SNT-100-BK-G 654.21,2635 r90 top value="J101: 5-6"
SH-J4 "SNT-100-BK-G" SNT-100-BK-G 754.21,2635 r90 top value="J101: 7-8"
SH-J5 "SNT-100-BK-G" SNT-100-BK-G 854.21,2635 r90 top value="J101: 9-10"
SH-J6 "SNT-100-BK-G" SNT-100-BK-G 954.21,2635 r90 top value="J101: 11-12"
SH-J7 "SNT-100-BK-G" SNT-100-BK-G 1054.21,2635 r90 top value="J101: 12-13"
SH-J8 "SNT-100-BK-G" SNT-100-BK-G 1154.21,2635 r90 top value="J101: 15-16"
SH-J9 "SNT-100-BK-G" SNT-100-BK-G 1254.21,2635 r90 top value="J101: 17-18"
SH-J10 "SNT-100-BK-G" SNT-100-BK-G 667,1999 r90 top value="J14: 1-2"
SH-J11 "SNT-100-BK-G" SNT-100-BK-G 1708.97,591.06 r90 top value="J14: 1-2"
SH-J12 "SNT-100-BK-G" SNT-100-BK-G 1808.97,591.06 r90 top value="J16: 1-2"
SH-J13 "SNT-100-BK-G" SNT-100-BK-G 1908.97,591.06 r90 top value="J17: 1-2"
SH-J14 "SNT-100-BK-G" SNT-100-BK-G 1184.79,586.37 r90 top value="J18: 1-2"
SH-J15 "SNT-100-BK-G" SNT-100-BK-G 820,588 r90 top value="J5: 1-2"
SH-J16 "SNT-100-BK-G" SNT-100-BK-G 920,588 r90 top value="J6: 1-2"
SH-J17 "SNT-100-BK-G" SNT-100-BK-G 1020,588 r90 top value="J7: 1-2"
SH-J18 "SNT-100-BK-G" SNT-100-BK-G 322,2468.97 r90 top value="J8: 1-2"
SH-J19 "SNT-100-BK-G" SNT-100-BK-G 1346.21,540 r180 top value="J9: 1-2"
SH-J20 "SNT-100-BK-G" SNT-100-BK-G 1549.35,541 r180 top value="J13: 1-2"
SH-J21 "SNT-100-BK-G" SNT-100-BK-G 670,1400 r90 top value="J15: 1-2"
SH-J22 "SNT-100-BK-G" SNT-100-BK-G 1565.39,1999 r90 top value="J19: 1-2"
SH-J23 "SNT-100-BK-G" SNT-100-BK-G 1682,1999 r90 top value="J20: 1-2"
SH-J24 "SNT-100-BK-G" SNT-100-BK-G 370,1000 r90 top value="J21: 1-2"
SH-J25 "SNT-100-BK-G" SNT-100-BK-G 1069.38,1033.52 r90 top value="J22: 1-2"
T1 "DMG1013UW-7" SOT-323 2191.4,3623.41 r0 top value=-20V
T2 "BC850CW,115" SOT-323 2034,3649 r0 top value="45 V"
TP1 "5001" Keystone5001 1601,3246 r90 top
TP2 "5001" Keystone5001 1601,3046 r90 top
TP3 "5001" Keystone5001 1601,3146 r90 top
TP4 "5001" Keystone5001 50,3835 r90 top
TP5 "5001" Keystone5001 50,3735 r90 top
TP6 "5001" Keystone5001 50,3635 r90 top
TP7 "5001" Keystone5001 50,3535 r90 top
TP8 "5001" Keystone5001 50,3435 r90 top
TP9 "5001" Keystone5001 50,3335 r90 top
TP10 "5001" Keystone5001 50,3235 r90 top
U1 "TPD6E004RSER" RSE0008A 1517.93,2513.49 r180 top
U2 "OPA2365AIDR" D0008A_L 322.66,488.99 r0 top
USB2 "1051640001" Molex_1051640001 450.09,4160.09 r180 top locked
XDS1 "MSP432E401YTPDTR" PDT0128A 648,3328 r90 top (schematic designator MSP1)
XDS2 "MSP430G2452IRSA16R" RSA0016B 1557,3603 r0 top (schematic designator MSP2)
Y1 "X1A0001410014" Epson_FC-135 1294.19,1231 r180 top
Y2 "X1E0000210179" FP-X1E0000210179_TSX-3225-MFG 1498,1211 r180 top
Y3 "NX3225GA-16.000M-STD-CRG-1" NDK_NX3225GA 555,3743 r90 top
ZZ2 "These assemblies must be clean and free from flux and all contaminants. Use of no clean flux is not acceptable." AssemblyNote 145,5140 r0 top
ZZ3 "These assemblies must comply with workmanship standards IPC-A-610 Class 2, unless otherwise specified." AssemblyNote 140,5250 r0 top
ZZ4 "Place a click-in Standoff (MAE-10, KangYang)  in hole MH1/MH2" AssemblyNote 135,5345 r0 top

## Footprints (in the part's own frame and the unit in brackets; to place one, negate y for a bottom-side part, rotate by r counter-clockwise, add the part's x,y. Pads: shape width x height; smd on the part's side, far side on the other; paste and mask are expansions set on the pad)
19-337_RGB [mm] "SMD, 6-Leads, Body 1.6x1.6mm"
  rect 0.55x0.4 smd: 1(-0.675,0.725) 3(-0.675,-0.725) 4(0.675,0.725) 6(0.675,-0.725)
  rect 0.7x0.5 smd: 2(-0.75,0) 5(0.75,0)
  silkscreen extent -1.2,0.6 -1.2,0.9, body extent -0.85,-0.85 0.85,0.85, height 0.35
0402 [mm] "0402 from SM-752 data"
  rect 0.8x0.6 smd: 1(-0.6,0) 2(0.6,0)
  silkscreen extent -1.22,-0.52 1.22,0.52, body extent -0.55,-0.3 0.55,0.3, height 0.6
0603 [mm] "0603 from SM-752 data"
  rect 1x0.95 smd: 1(-0.8,0) 2(0.8,0)
  silkscreen extent -1.52,-0.69 1.52,0.69, body extent -0.87,-0.47 0.87,0.47, height 1
1111C_Red [mm] "SMD, 2-Leads, Body 1.6x0.8mm"
  rect 0.8x0.8 smd: 1(-0.8,0) 2(0.8,0)
  silkscreen extent -1,-0.7 1.7,0.7, body extent -0.85,-0.45 0.85,0.45, height 0.8
3216-18 [mm] "Based on AVX recommendation in http://www.avx.com/download/software/literature/AVX-Footprint-Library.pdf"
  rrect7% 1.4x1.8 smd: 1(-1.3,0) 2(1.3,0)
  silkscreen extent -1.9,-1.12 0.8,1.12, body extent -1.7,-0.9 1.7,0.9, height 1.82
AssemblyNote [mil] "Assembly Note"
BoosterPack_40pin_J1J3 [mm] "Receptacle, 2.54mm, 10x2, TH"
  rrect6% 1.55x1.55 hole 1.02: 1(1.27,11.43)
  round 1.55 hole 1.02: 2(1.27,8.89) 3(1.27,6.35) 4(1.27,3.81) 5(1.27,1.27) 6(1.27,-1.27) 7(1.27,-3.81) 8(1.27,-6.35) 9(1.27,-8.89) 10(1.27,-11.43) 21(-1.27,11.43) 22(-1.27,8.89) 23(-1.27,6.35) 24(-1.27,3.81) 25(-1.27,1.27) 26(-1.27,-1.27) 27(-1.27,-3.81) 28(-1.27,-6.35) 29(-1.27,-8.89) 30(-1.27,-11.43)
  silkscreen extent -7.62,-12.95 7.62,12.95, body extent -2.48,-12.95 2.48,12.95, height 8.51
BoosterPack_40pin_J2J4 [mm] "Receptacle, 2.54mm, 10x2, TH"
  round 1.55 hole 1.02: 11(-1.27,-11.43) 12(-1.27,-8.89) 13(-1.27,-6.35) 14(-1.27,-3.81) 15(-1.27,-1.27) 16(-1.27,1.27) 17(-1.27,3.81) 18(-1.27,6.35) 19(-1.27,8.89) 20(-1.27,11.43) 31(1.27,-11.43) 32(1.27,-8.89) 33(1.27,-6.35) 34(1.27,-3.81) 35(1.27,-1.27) 36(1.27,1.27) 37(1.27,3.81) 38(1.27,6.35) 39(1.27,8.89) 40(1.27,11.43)
  silkscreen extent -7.62,-12.95 2.48,12.95, body extent -2.48,-12.95 2.48,12.95, height 8.51
CBC2518 [mm] "Taiyo Yuden"
  rect 0.6x2 smd: 1(-1.05,0) 2(1.05,0)
  silkscreen extent -0.45,-1.1 0.45,1.1, body extent -1.35,-1 1.35,1, height 2
CE_Mark_5mm [mil] "Minimum text height for CE Mark"
  silkscreen extent -138,-98 138,98
CONN_90120-0122 [mm] "Molex"
  rect 1.65x1.65 hole 1.016 mask+0: 1(-1.27,0)
  round 1.65 hole 1.016 mask+0: 2(1.27,0)
  silkscreen extent -3.56,-1.27 2.54,1.27, body extent -2.54,-1.27 2.54,1.27, height 9.29
CONN_PEC03SAAN [mm] "SULLINS"
  rect 1.5x1.5 hole 1.016: 1(-2.54,0)
  round 1.5 hole 1.016: 2(0,0) 3(2.54,0)
  silkscreen extent -4.72,-1.27 3.81,1.27, body extent -3.84,-1.3 3.84,1.3, height 8.38
D0008A_L [mm] "SOIC, 8-Leads, Body 4.9x3.9mm, Pitch 1.27mm, IPC High Density"
  oval 1.25x0.55 smd: 1(-2.625,1.905) 2(-2.625,0.635) 3(-2.625,-0.635) 4(-2.625,-1.905) 5(2.625,-1.905) 6(2.625,-0.635) 7(2.625,0.635) 8(2.625,1.905)
  silkscreen extent -3.1,-2.5 0.9,2.5, body extent -3,-2.45 3,2.45, height 1.63
DBV0005A_N [mm] "SOT23, 5-Leads, Body 2.9x1.6mm, Pitch 0.95mm, Lead Span 2.8mm, IPC Medium Density"
  rrect17% 1x0.6 smd: 1(-1.375,0.95) 2(-1.375,0) 3(-1.375,-0.95) 4(1.375,-0.95) 5(1.375,0.95)
  silkscreen extent -0.25,-1.55 0.25,1.55, body extent -1.42,-1.46 1.42,1.46, height 1.09
DCK0005A_N [mm] "SOT353, 5-Leads, Body 2x1.3mm, Pitch 0.65mm, Lead Span 2.1mm, IPC Medium Density"
  rrect25% 0.85x0.4 smd: 1(-1.125,0.65) 2(-1.125,0) 3(-1.125,-0.65) 4(1.125,-0.65) 5(1.125,0.65)
  silkscreen extent -1.48,-1.02 0.55,1.1, body extent -1.14,-1 1.14,1, height 0.95
DEC0002A [mm] "X1SON-2"
  rrect57% 0.35x0.6 smd paste-0.5 mask-0.05: 1(-0.325,0) 2(0.325,0)
  rrect33% 0.3x0.5 on Top Paste: 1S(-0.35,0) 2S(0.35,0)
  body extent -0.5,-0.3 0.5,0.3, height 0.5
DRB0008A [mm] "VSON-8"
  rrect32% 0.6x0.31 smd: 1(-1.4,0.975) 2(-1.4,0.325) 3(-1.4,-0.325) 4(-1.4,-0.975) 5(1.4,-0.975) 6(1.4,-0.325) 7(1.4,0.325) 8(1.4,0.975)
  rrect7% 1.5x1.75 smd paste-0.75: 9(0,0)
  Top Layer region: -0.7,-0.875 -0.49,-0.875 -0.471,-0.879 -0.455,-0.89 -0.444,-0.906 -0.44,-0.925 -0.44,-0.925 -0.44,-1.65 -0.436,-1.669 -0.425,-1.685 -0.409,-1.696 -0.39,-1.7 -0.39,-1.7 -0.26,-1.7 -0.241,-1.696 -0.225,-1.685 -0.214,-1.669 -0.21,-1.65 -0.21,-1.65 -0.21,-0.925 -0.206,-0.906 -0.195,-0.89 -0.179,-0.879 -0.16,-0.875 -0.16,-0.875 0.16,-0.875 0.179,-0.879 0.195,-0.89 0.206,-0.906 0.21,-0.925 0.21,-0.925 0.21,-1.65 0.21,-1.65 0.214,-1.669 0.225,-1.685 0.241,-1.696 0.26,-1.7 0.26,-1.7 0.39,-1.7 0.409,-1.696 0.425,-1.685 0.436,-1.669 0.44,-1.65 0.44,-1.65 0.44,-0.925 0.444,-0.906 0.455,-0.89 0.471,-0.879 0.49,-0.875 0.49,-0.875 0.7,-0.875 0.719,-0.871 0.735,-0.86 0.746,-0.844 0.75,-0.825 0.75,-0.825 0.75,0.825 0.746,0.844 0.735,0.86 0.719,0.871 0.7,0.875 0.7,0.875 0.49,0.875 0.471,0.879 0.455,0.89 0.444,0.906 0.44,0.925 0.44,0.925 0.44,1.65 0.436,1.669 0.425,1.685 0.409,1.696 0.39,1.7 0.39,1.7 0.26,1.7 0.241,1.696 0.225,1.685 0.214,1.669 0.21,1.65 0.21,1.65 0.21,1.65 0.21,0.925 0.206,0.906 0.195,0.89 0.179,0.879 0.16,0.875 0.16,0.875 -0.16,0.875 -0.179,0.879 -0.195,0.89 -0.206,0.906 -0.21,0.925 -0.21,0.925 -0.21,1.65 -0.214,1.669 -0.225,1.685 -0.241,1.696 -0.26,1.7 -0.26,1.7 -0.39,1.7 -0.409,1.696 -0.425,1.685 -0.436,1.669 -0.44,1.65 -0.44,1.65 -0.44,0.925 -0.444,0.906 -0.455,0.89 -0.471,0.879 -0.49,0.875 -0.49,0.875 -0.7,0.875 -0.719,0.871 -0.735,0.86 -0.746,0.844 -0.75,0.825 -0.75,0.825 -0.75,-0.825 -0.746,-0.844 -0.735,-0.86 -0.719,-0.871 -0.7,-0.875
  silkscreen extent -1.73,-1.73 1.73,1.73, body extent -1.5,-1.5 1.5,1.5, height 0.77
DRY0006A [mm] "PSON, 6-Leads, Body 1x1.45mm, Pitch 0.5mm, TI Recommended"
  rect 0.35x0.2 smd: 1(-0.275,0.5)
  rect 0.3x0.2 smd: 2(-0.3,0) 3(-0.3,-0.5) 4(0.3,-0.5) 5(0.3,0) 6(0.3,0.5)
  silkscreen extent -0.5,-0.85 0.2,0.85, body extent -0.53,-0.75 0.53,0.75, height 0.61
Epson_FC-135 [mm] "SMD, 2-Leads, Body 3.2x1.5mm"
  rect 1x1.8 smd: 1(-1.25,0) 2(1.25,0)
  silkscreen extent -0.35,-0.8 0.35,0.8, body extent -1.65,-0.8 1.65,0.8, height 0.9
ERA3A [mm] "SMD, 2-Leads, Body 1.6x0.8mm"
  rrect15% 0.65x0.9 smd: 1(-0.725,0) 2(0.725,0)
  body extent -0.9,-0.5 0.9,0.5, height 0.55
ESD_Overlay_Large [mil]
  silkscreen extent -254,-219 250,219
FCC_disclaimer [mil]
Fiducial10-30 [mm]
  round 1 smd mask+1: 1(0,0)
  Top Layer keep-out circle w1.678: c0,0 r0.75
FP-ERA-2AEB104X_0402-MFG [mm]
  rrect21% 0.475x0.5 smd paste+0 mask+0: 1(-0.512,0) 2(0.512,0)
  silkscreen extent -0.5,-0.63 0.5,0.63, body extent -0.85,-0.4 0.85,0.4, height 0.25
FP-VEMD4110X01_0805-MFG [mm]
  rrect17% 0.9x0.6 smd paste+0 mask+0: 1(0,-0.8)
  rrect11% 0.9x1.3 smd paste+0 mask+0: 2(0,0.45)
  silkscreen extent -0.85,-1.78 0.85,1.05, body extent -0.77,-1.2 0.77,1.2, height 0.25
FP-X1E0000210179_TSX-3225-MFG [mm] "SMD, 4-Leads, Body 3.2x2.5mm"
  rrect9% 1.4x1.15 smd paste+0 mask+0: 1(-1.1,-0.8) 2(1.1,-0.8) 3(1.1,0.8) 4(-1.1,0.8)
  silkscreen extent -1.23,-2.05 0,1.33, body extent -1.9,-1.48 1.9,1.48, height 0.25
Keystone5001 [mil] "For Keystone 500x miniature loop terminals"
  round 80 hole 40: 1(0,0)
  silkscreen extent -52,-52 52,52, body extent -49,-49 49,49, height 182
KY_MAE-10 [mil] "Spacer Nylon Support"
  body extent -125,-108 125,108, height 394
LED_LTST-C190 [mm] "Lite-On"
  rect 0.8x0.8 smd: 1(-0.75,0) 2(0.75,0)
  silkscreen extent -1.1,-0.8 1.8,0.8, body extent -0.85,-0.45 0.85,0.45, height 0.9
Molex_1051640001 [mm] "Receptacle, USB 2.0, Micro B, 5 Pos, 0.65mm Pitch, R/A, SMT"
  rrect22% 0.45x1.38 smd: 1(1.3,4.11) 2(0.65,4.11) 3(0,4.11) 4(-0.65,4.11) 5(-1.3,4.11)
  rrect7% 1.475x2.1 smd: 6(-2.462,3.75) 11(2.462,3.75)
  rrect100% 1.4x2.1 hole 0.6 slot 1.3 at 90 deg: 7(-3.95,1.45) 10(3.95,1.45)
  rrect7% 1.375x1.9 smd: 8(-0.937,1.45) 9(0.937,1.45)
  silkscreen extent 1.2,5.1 1.4,5.4, body extent -4.1,-0.7 4.1,4.47, height 2.45
NDK_NX3225GA [mm] "NDK"
  rect 1.2x1.4 smd: 1(-0.8,1.1) 2(-0.8,-1.1) 3(0.8,-1.1) 4(0.8,1.1)
  silkscreen extent -1.9,-0.1 1.4,2, body extent -1.3,-1.65 1.3,1.65, height 0.9
NPTH125mil [mil]
  round 120 hole 125 unplated mask+15: 1(0,0)
PDT0128A [mm] "Thin QFP, 128-Leads, Body 14x14mm, Pitch 0.4mm"
  oval 1.4x0.2 smd: 1(-7.7,6.2) 2(-7.7,5.8) 3(-7.7,5.4) 4(-7.7,5) 5(-7.7,4.6) 6(-7.7,4.2) 7(-7.7,3.8) 8(-7.7,3.4) 9(-7.7,3) 10(-7.7,2.6) 11(-7.7,2.2) 12(-7.7,1.8) 13(-7.7,1.4) 14(-7.7,1) 15(-7.7,0.6) 16(-7.7,0.2) 17(-7.7,-0.2) 18(-7.7,-0.6) 19(-7.7,-1) 20(-7.7,-1.4) 21(-7.7,-1.8) 22(-7.7,-2.2) 23(-7.7,-2.6) 24(-7.7,-3) 25(-7.7,-3.4) 26(-7.7,-3.8) 27(-7.7,-4.2) 28(-7.7,-4.6) 29(-7.7,-5) 30(-7.7,-5.4) 31(-7.7,-5.8) 32(-7.7,-6.2) 65(7.7,-6.2) 66(7.7,-5.8) 67(7.7,-5.4) 68(7.7,-5) 69(7.7,-4.6) 70(7.7,-4.2) 71(7.7,-3.8) 72(7.7,-3.4) 73(7.7,-3) 74(7.7,-2.6) 75(7.7,-2.2) 76(7.7,-1.8) 77(7.7,-1.4) 78(7.7,-1) 79(7.7,-0.6) 80(7.7,-0.2) 81(7.7,0.2) 82(7.7,0.6) 83(7.7,1) 84(7.7,1.4) 85(7.7,1.8) 86(7.7,2.2) 87(7.7,2.6) 88(7.7,3) 89(7.7,3.4) 90(7.7,3.8) 91(7.7,4.2) 92(7.7,4.6) 93(7.7,5) 94(7.7,5.4) 95(7.7,5.8) 96(7.7,6.2)
  oval 0.2x1.4 smd: 33(-6.2,-7.7) 34(-5.8,-7.7) 35(-5.4,-7.7) 36(-5,-7.7) 37(-4.6,-7.7) 38(-4.2,-7.7) 39(-3.8,-7.7) 40(-3.4,-7.7) 41(-3,-7.7) 42(-2.6,-7.7) 43(-2.2,-7.7) 44(-1.8,-7.7) 45(-1.4,-7.7) 46(-1,-7.7) 47(-0.6,-7.7) 48(-0.2,-7.7) 49(0.2,-7.7) 50(0.6,-7.7) 51(1,-7.7) 52(1.4,-7.7) 53(1.8,-7.7) 54(2.2,-7.7) 55(2.6,-7.7) 56(3,-7.7) 57(3.4,-7.7) 58(3.8,-7.7) 59(4.2,-7.7) 60(4.6,-7.7) 61(5,-7.7) 62(5.4,-7.7) 63(5.8,-7.7) 64(6.2,-7.7) 97(6.2,7.7) 98(5.8,7.7) 99(5.4,7.7) 100(5,7.7) 101(4.6,7.7) 102(4.2,7.7) 103(3.8,7.7) 104(3.4,7.7) 105(3,7.7) 106(2.6,7.7) 107(2.2,7.7) 108(1.8,7.7) 109(1.4,7.7) 110(1,7.7) 111(0.6,7.7) 112(0.2,7.7) 113(-0.2,7.7) 114(-0.6,7.7) 115(-1,7.7) 116(-1.4,7.7) 117(-1.8,7.7) 118(-2.2,7.7) 119(-2.6,7.7) 120(-3,7.7) 121(-3.4,7.7) 122(-3.8,7.7) 123(-4.2,7.7) 124(-4.6,7.7) 125(-5,7.7) 126(-5.4,7.7) 127(-5.8,7.7) 128(-6.2,7.7)
  silkscreen extent -7.7,-6.3 6.3,6.99, body extent -8,-8 8,8, height 1.07
PEC03SAAN_Launchpad_3V3 [mm] "SULLINS"
  rect 1.65x1.65 hole 1.016: 1(-2.54,0)
  round 1.65 hole 1.016: 2(0,0) 3(2.54,0)
  silkscreen extent -3.81,-1.27 3.81,6.3, body extent -3.84,-1.3 3.84,1.3, height 8.38
PEC03SAAN_Launchpad_5V0 [mm] "SULLINS"
  rect 1.65x1.65 hole 1.016: 1(-2.54,0)
  round 1.65 hole 1.016: 2(0,0) 3(2.54,0)
  silkscreen extent -3.81,-6.31 3.81,1.27, body extent -3.84,-1.3 3.84,1.3, height 8.38
PM0064A-MFG [mm]
  rrect33% 1.5x0.3 smd paste+0 mask+0: 1(-5.7,3.75) 2(-5.7,3.25) 3(-5.7,2.75) 4(-5.7,2.25) 5(-5.7,1.75) 6(-5.7,1.25) 7(-5.7,0.75) 8(-5.7,0.25) 9(-5.7,-0.25) 10(-5.7,-0.75) 11(-5.7,-1.25) 12(-5.7,-1.75) 13(-5.7,-2.25) 14(-5.7,-2.75) 15(-5.7,-3.25) 16(-5.7,-3.75) 33(5.7,-3.75) 34(5.7,-3.25) 35(5.7,-2.75) 36(5.7,-2.25) 37(5.7,-1.75) 38(5.7,-1.25) 39(5.7,-0.75) 40(5.7,-0.25) 41(5.7,0.25) 42(5.7,0.75) 43(5.7,1.25) 44(5.7,1.75) 45(5.7,2.25) 46(5.7,2.75) 47(5.7,3.25) 48(5.7,3.75)
  rrect33% 0.3x1.5 smd paste+0 mask+0: 17(-3.75,-5.7) 18(-3.25,-5.7) 19(-2.75,-5.7) 20(-2.25,-5.7) 21(-1.75,-5.7) 22(-1.25,-5.7) 23(-0.75,-5.7) 24(-0.25,-5.7) 25(0.25,-5.7) 26(0.75,-5.7) 27(1.25,-5.7) 28(1.75,-5.7) 29(2.25,-5.7) 30(2.75,-5.7) 31(3.25,-5.7) 32(3.75,-5.7) 49(3.75,5.7) 50(3.25,5.7) 51(2.75,5.7) 52(2.25,5.7) 53(1.75,5.7) 54(1.25,5.7) 55(0.75,5.7) 56(0.25,5.7) 57(-0.25,5.7) 58(-0.75,5.7) 59(-1.25,5.7) 60(-1.75,5.7) 61(-2.25,5.7) 62(-2.75,5.7) 63(-3.25,5.7) 64(-3.75,5.7)
  silkscreen extent -7.12,-5.1 5.1,5.1, body extent -6.55,-6.55 6.55,6.55, height 0.25
RSA0016B [mm] "QFN, 16-Leads, Body 4x4mm, Pitch 0.65mm, Thermal Pad 2.7x2.7mm, TI Recommended"
  oval 0.6x0.3 smd: 1(-1.9,0.975) 2(-1.9,0.325) 3(-1.9,-0.325) 4(-1.9,-0.975) 9(1.9,-0.975) 10(1.9,-0.325) 11(1.9,0.325) 12(1.9,0.975)
  oval 0.3x0.6 smd: 5(-0.975,-1.9) 6(-0.325,-1.9) 7(0.325,-1.9) 8(0.975,-1.9) 13(0.975,1.9) 14(0.325,1.9) 15(-0.325,1.9) 16(-0.975,1.9)
  rect 2.7x2.7 smd paste-1.35: 17(0,0)
  Top Layer keep-out region: -2,1.5 -1.5,1.5 -1.5,2 -2,2
  silkscreen extent -2.2,-2.2 2.2,2.2, body extent -2.05,-2.05 2.05,2.05, height 1.01
RSE0008A [mm] "QFN, 8-Leads, Body 1.5x1.5mm, Pitch 0.5mm, TI Recommended"
  rrect40% 0.55x0.25 smd: 1(-0.675,0.5) 3(-0.675,-0.5) 5(0.675,-0.5) 7(0.675,0.5)
  rrect50% 0.55x0.2 smd: 2(-0.675,0) 6(0.675,0)
  rrect33% 0.3x0.6 smd: 4(0,-0.65) 8(0,0.65)
  silkscreen extent -1.02,-0.92 0.77,0.93, body extent -0.75,-0.75 0.75,0.75, height 0.6
Samtec_FTSH-105-01-x-DV-K [mm] "Header(Shrouded), 1.27mm, 5x2, SMT"
  rect 2.79x0.74 smd: 1(-2.035,2.54) 2(2.035,2.54) 3(-2.035,1.27) 4(2.035,1.27) 5(-2.035,0) 6(2.035,0) 7(-2.035,-1.27) 8(2.035,-1.27) 9(-2.035,-2.54) 10(2.035,-2.54)
  silkscreen extent -3.73,-3.48 3.73,3.48, body extent -2.92,-3.18 2.92,3.17, height 6.13
Samtec_HTSW-105-07-G-S [mm] "Samtec 100mil, 1x5, 230 mil above insulator"
  rrect6% 1.65x1.65 hole 1.016: 1(-5.08,0)
  round 1.65 hole 1.016: 2(-2.54,0) 3(0,0) 4(2.54,0) 5(5.08,0)
  silkscreen extent -7.11,-1.27 6.35,1.27, body extent -6.35,-1.27 6.35,1.27, height 8.38
SNT-100-BK-G [mil] "Samtec STEP model"
  round 1 on Mech3: 0(0,0)
  body extent -100,-50 100,50, height 344
SOT-323 [mm] "Diodes Inc recommended land pattern.  2016-02-24"
  rrect21% 0.6x0.47 smd: 1(-0.95,0.65) 2(-0.95,-0.65) 3(0.95,0)
  silkscreen extent -1.14,-1.22 0.77,1.22, body extent -1.13,-1.13 1.12,1.12, height 1.13
Sullins_PBC03DAAN [mm] "Sullins 100mil, 2x3, 230 mil above insulator"
  rect 1.65x1.65 hole 1.016: 1(-1.27,2.54)
  round 1.65 hole 1.016: 2(1.27,2.54) 3(-1.27,0) 4(1.27,0) 5(-1.27,-2.54) 6(1.27,-2.54)
  silkscreen extent -2.67,-3.81 2.54,4.58, body extent -2.54,-3.81 2.54,3.81, height 8.38
Sullins_PxC09DAAN [mm] "Header, 2.54mm, 9x2, TH"
  rrect50% 1.55x1.55 hole 1.02: 1(-1.27,-10.16)
  round 1.55 hole 1.02: 2(1.27,-10.16) 3(-1.27,-7.62) 4(1.27,-7.62) 5(-1.27,-5.08) 6(1.27,-5.08) 7(-1.27,-2.54) 8(1.27,-2.54) 9(-1.27,0) 10(1.27,0) 11(-1.27,2.54) 12(1.27,2.54) 13(-1.27,5.08) 14(1.27,5.08) 15(-1.27,7.62) 16(1.27,7.62) 17(-1.27,10.16) 18(1.27,10.16)
  silkscreen extent -2.95,-11.43 2.54,11.43, body extent -2.54,-11.43 2.54,11.43, height 8.38
SW_1188E [mm] "SMD, 4-Leads, Body 7.8x3.5mm"
  rrect10% 1x1.45 smd: 1(-1.1,3.375) 2(-1.1,-3.375)
  rrect11% 1.3x0.9 smd: 3(0.7,2.1) 4(0.7,-2.1)
  round 0 hole 0.9 unplated: ""(-0.35,-1.15) ""(-0.35,1.15)
  silkscreen extent -1.97,-2.28 0.95,2.28, body extent -2.55,-3.9 1.05,3.9, height 3.5
TE_5-1814832-1 [mm] "SMA Straight PCB Socket Die Cast, TH"
  round 2 hole 1.5: 1(0,0)
  round 2.1 hole 1.6: 2(-2.54,2.54) 3(-2.54,-2.54) 4(2.54,-2.54) 5(2.54,2.54)
  silkscreen extent -3.2,-3.2 3.2,3.2, body extent -3.2,-3.2 3.2,3.2, height 9.5
TI_Horizontal_Overlay_Medium [mil]
  silkscreen extent -750,-93 750,94
TI_Horizontal_Overlay_Small [mil]
  silkscreen extent -545,-68 545,67
WEEE_Minimum [mil] "WEEElie bin"
  silkscreen extent -95,-172 99,104
WURTH_61301021121 [mm] "Header, 2.54mm, 5x2, TH"
  rrect25% 1.65x1.65 hole 1.15: 1(-5.08,-1.27)
  round 1.65 hole 1.15: 2(-5.08,1.27) 3(-2.54,-1.27) 4(-2.54,1.27) 5(0,-1.27) 6(0,1.27) 7(2.54,-1.27) 8(2.54,1.27) 9(5.08,-1.27) 10(5.08,1.27)
  silkscreen extent -6.35,-2.9 6.35,2.54, body extent -6.35,-2.54 6.35,2.54, height 8.54